# Allegro board arena_12-12_v1.brd
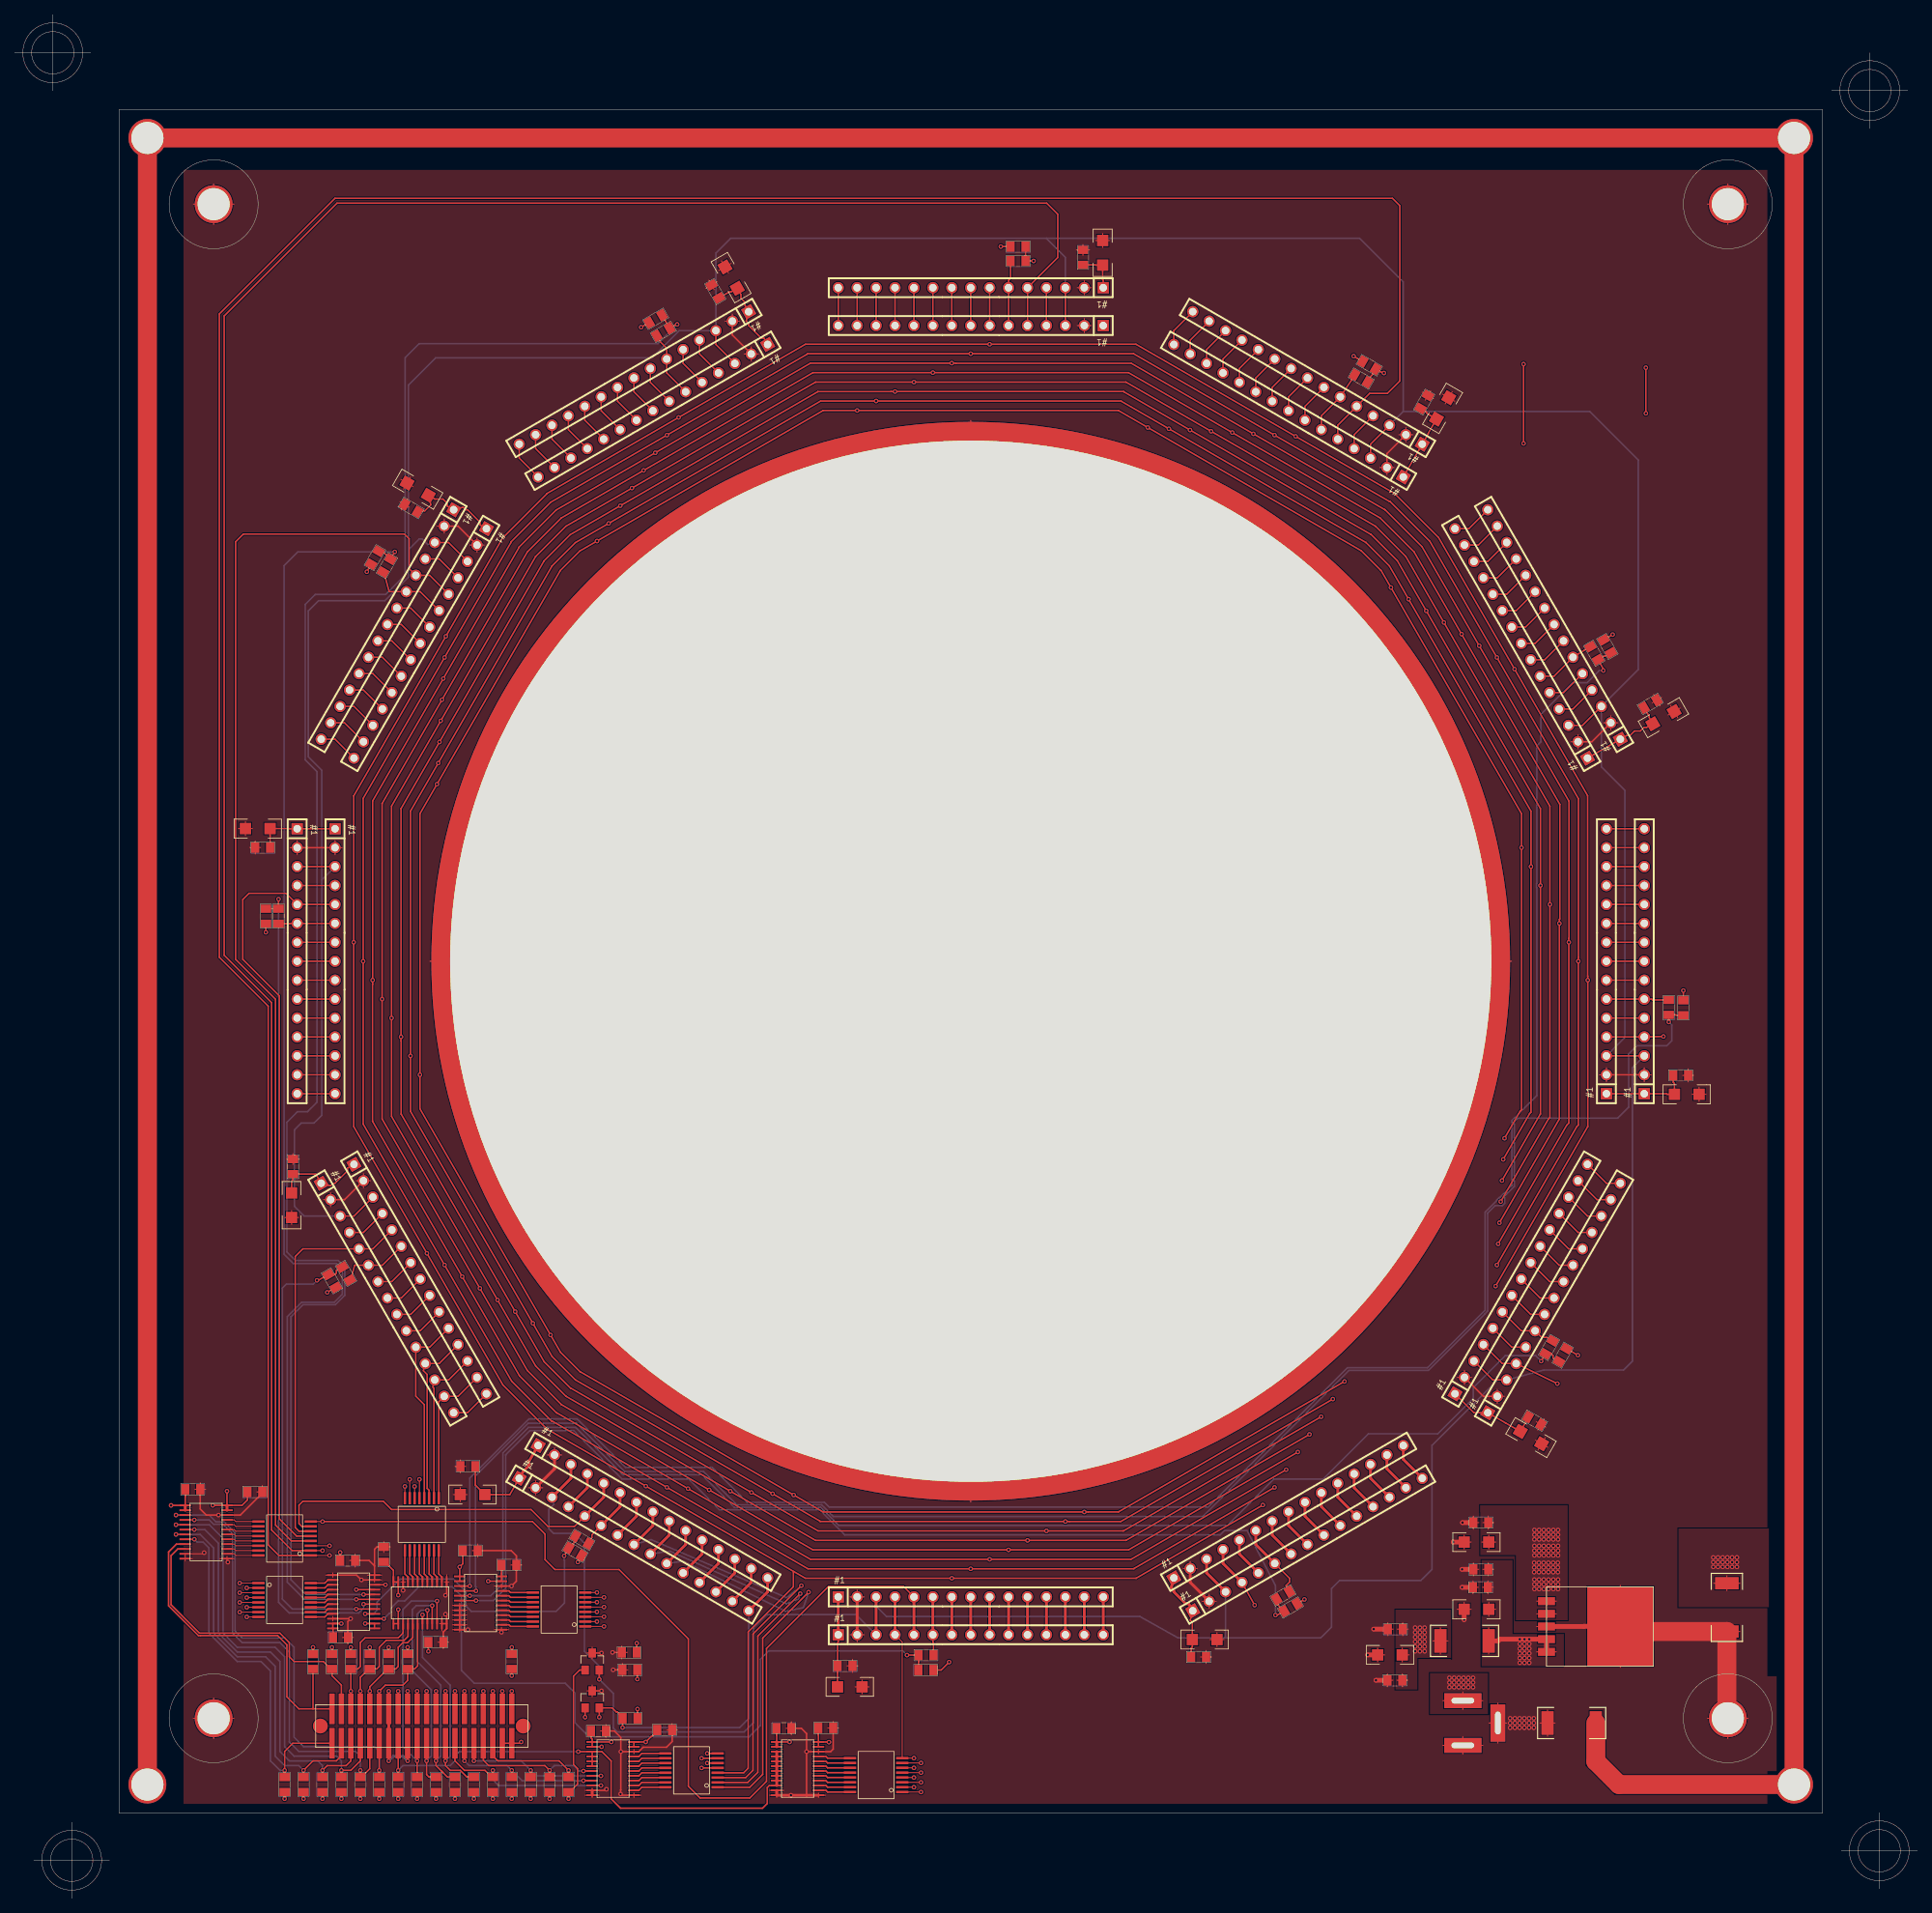
[diagram p0: board, top side]
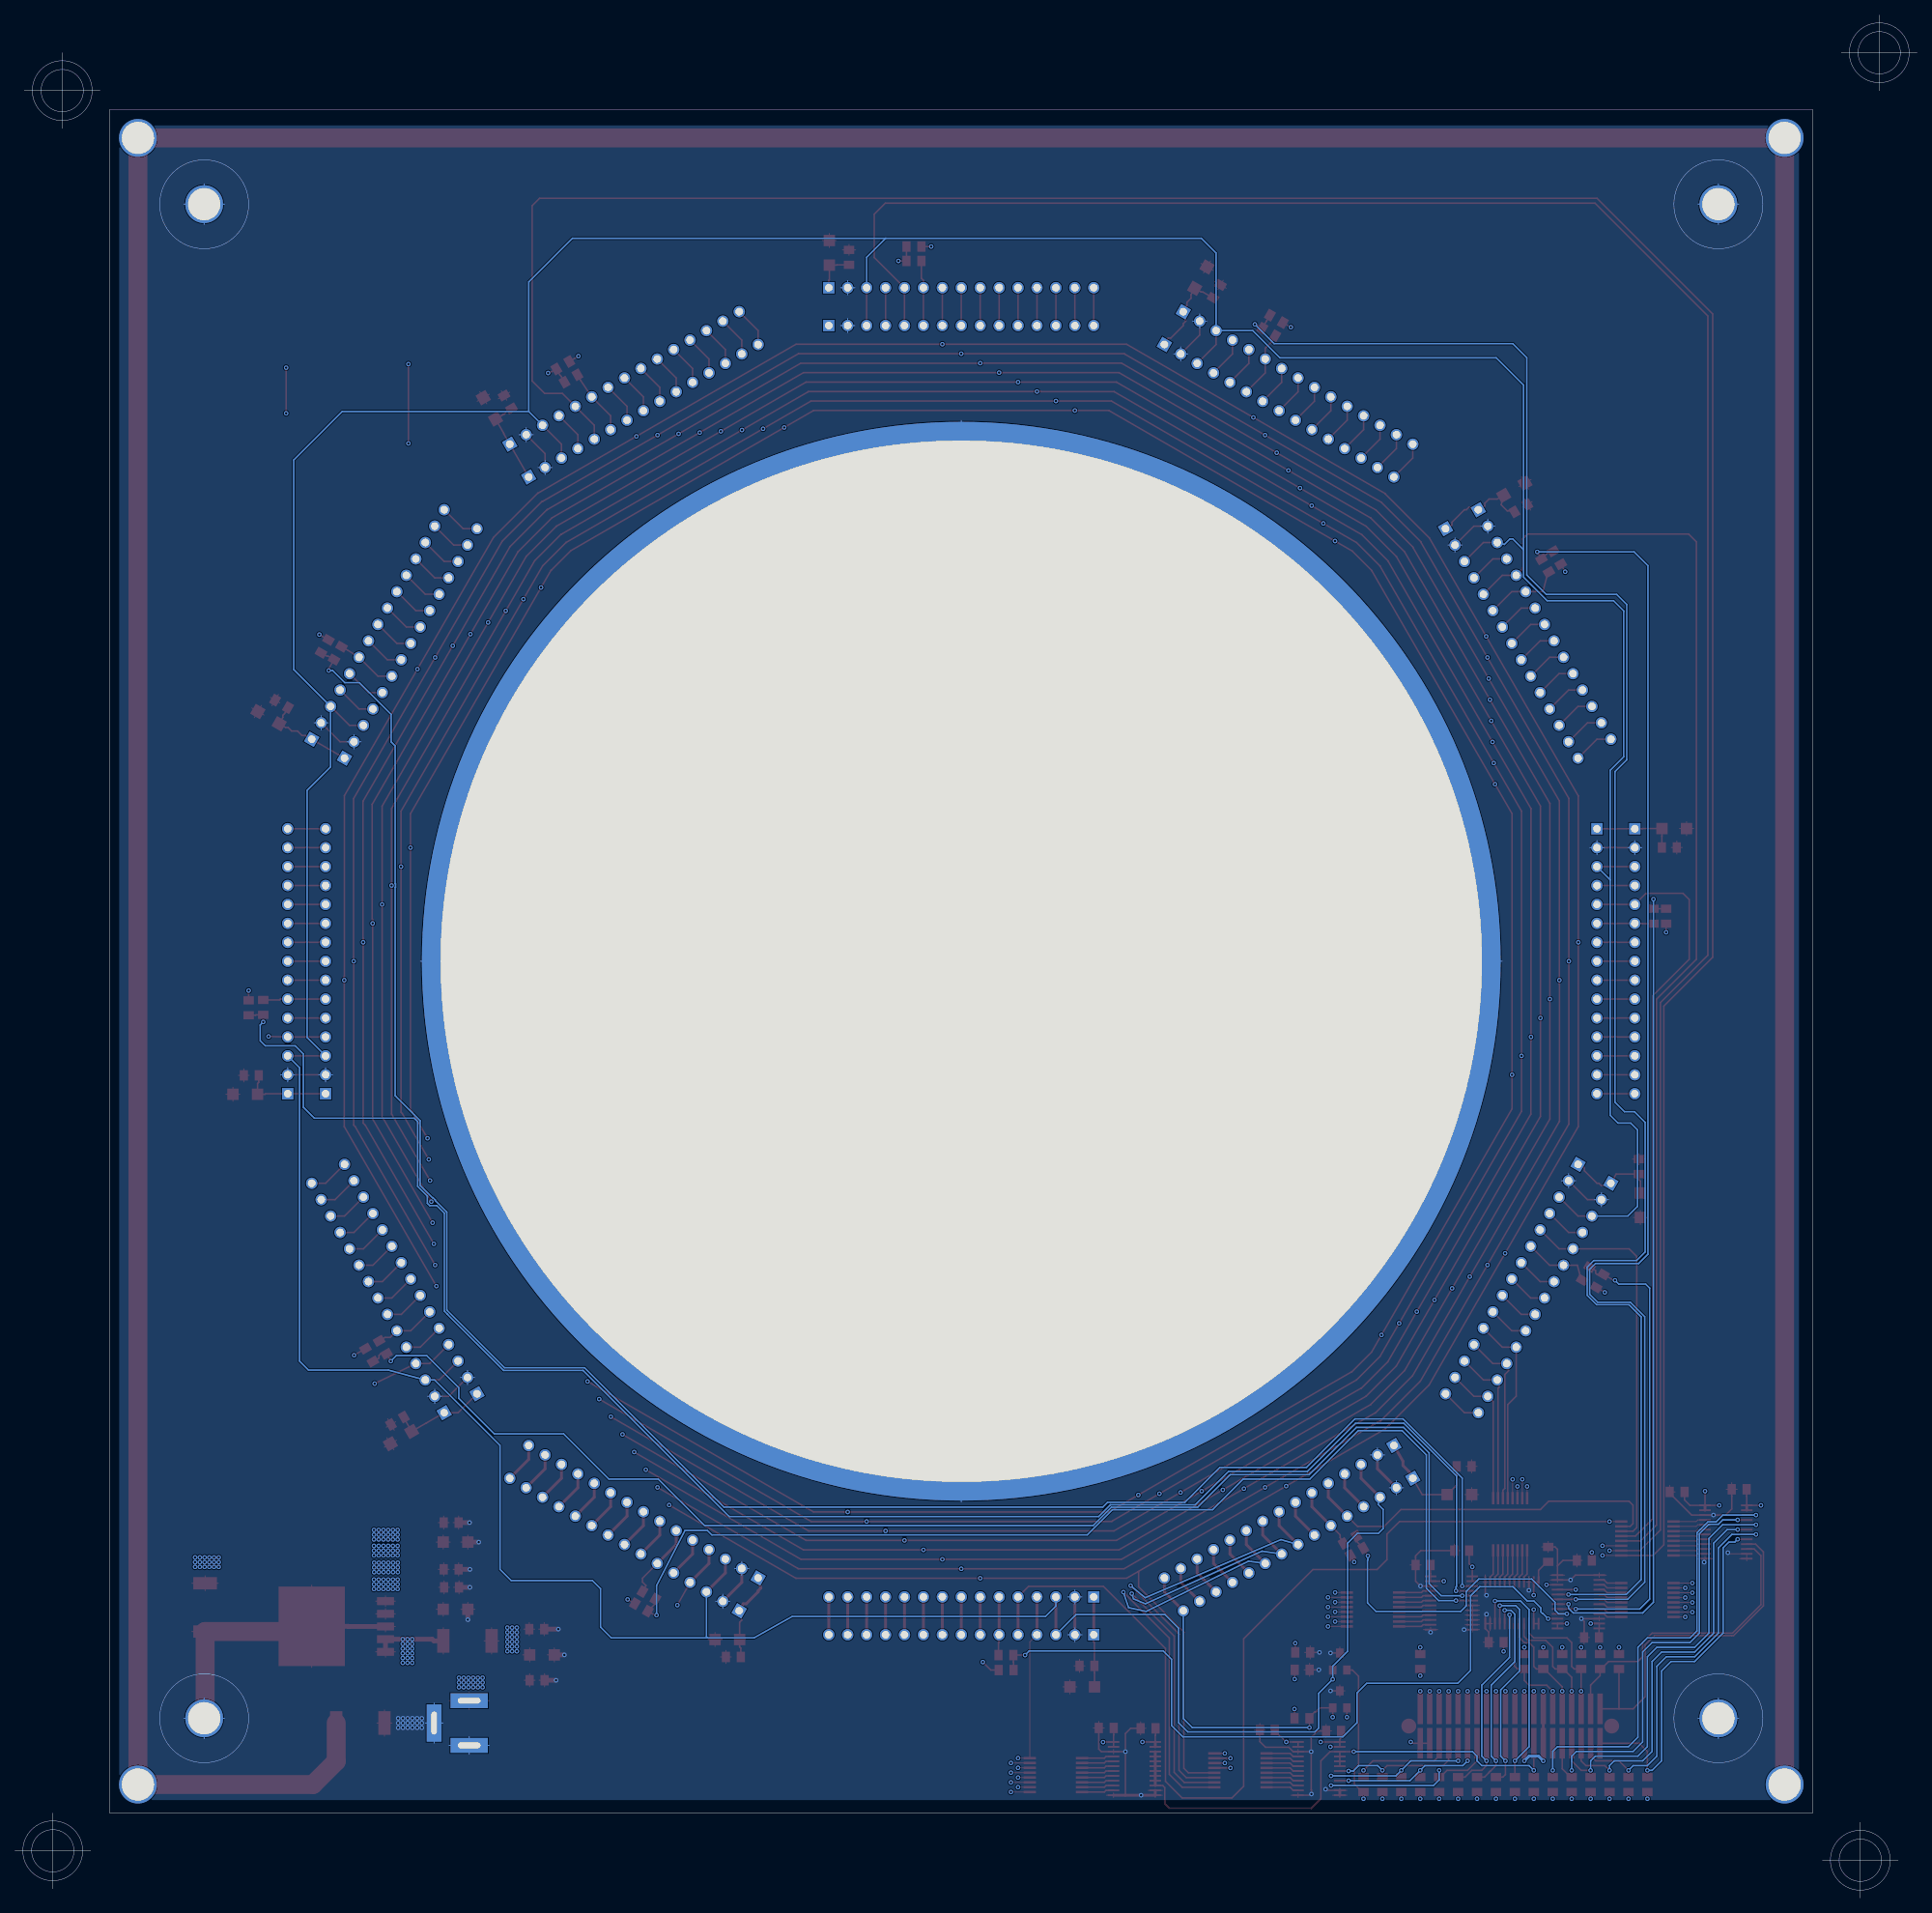
[diagram p1: board, bottom side, seen from below]

Outline 255.27 x 252.73 mm; copper layers: TOP, PWR, LAYER 1, GND2, LAYER 2, BOTTOM. Coordinates in mm from the lower left corner of the outline.
Outline path: circle c5.08,247.65 r2.84 ; circle c5.08,247.65 r4.02 ; circle c7.62,5.08 r2.84 ; circle c7.62,5.08 r4.02 ; circle c26.67,227.31 r5.97 ; circle c26.67,24.13 r5.97 ; circle c128.27,125.73 r69.85 ; circle c229.87,227.31 r5.97 ; circle c229.87,24.13 r5.97 ; circle c248.92,242.57 r2.84 ; circle c248.92,242.57 r4.02 ; circle c250.19,6.35 r2.84 ; circle c250.19,6.35 r4.02 ; 0,247.65 10.16,247.65 ; 2.54,5.08 12.7,5.08 ; 5.08,252.73 5.08,242.57 ; 7.62,10.16 7.62,0 ; 125.98,125.73 130.56,125.73 ; 128.27,123.44 128.27,128.02 ; 243.84,242.57 254,242.57 ; 245.11,6.35 255.27,6.35 ; 248.92,247.65 248.92,237.49 ; 250.19,11.43 250.19,1.27 ; 13.97,240.03 13.97,11.43 242.57,11.43 242.57,240.03 13.97,240.03

## Placement (name value [footprint] x y rotation side)
C1  10uF  [1206]  96.11 217.47 120 top
C2  10uF  [1206]  145.97 220.8 90 top
C3  0.1uF  [EIA0805]  189.13 200.79 60 top
C4  10uF  [1206]  191.59 199.92 60 top
C5  0.1uF  [EIA0805]  143.33 220.19 90 top
C6  0.1uF  [EIA0805]  93.98 215.62 120 top
C7  0.1uF  [0805]  53.16 186.54 150 top
C8  10uF  [1206]  54.05 189.08 150 top
C9  10uF  [1206]  224.36 107.87 0 top
C10  0.1uF  [EIA0805]  223.55 110.41 0 top
C11  10uF  [1206]  32.59 143.54 180 top
C12  0.1uF  [EIA0805]  33.25 141 180 top
C13  10uF  [1206]  203.45 61.8 330 top
C14  0.1uF  [EIA0805]  203.94 64.06 330 top
C15  10uF  [1206]  61.42 54.15 180 top
C16  0.1uF  [EIA0805]  60.78 57.94 180 top
C17  10uF  [1206]  159.66 34.7 0 top
C18  0.1uF  [EIA0805]  158.85 32.36 0 top
C19  0.1uF  [EIA0805]  111.4 31.17 0 top
C20  10uF  [1206]  112.04 28.35 0 top
C21  10uF  [1206]  37.13 92.99 270 top
C22  0.1uF  [EIA0805]  37.31 98.17 90 top
C23  10uF  [1206]  221.23 158.42 30 top
C24  0.1uF  [EIA0805]  219.48 160.27 30 top
C25  0.1uF  [EIA0805]  78.31 22.43 0 top
C26  0.1uF  [EIA0805]  87.2 22.56 0 top
C27  0.1uF  [EIA0805]  43.69 34.98 0 top
C28  0.1uF  [EIA0805]  49.5 46.13 90 top
C29  0.1uF  [EIA0805]  103.2 22.78 0 top
C30  0.1uF  [EIA0805]  108.81 22.83 0 top
C31  0.1uF  [EIA0805]  56.49 34.34 0 top
C32  0.1uF  [EIA0805]  44.65 45.31 0 top
C33  0.1uF  [EIA0805]  23.88 54.86 0 top
C34  0.1uF  [EIA0805]  32.21 54.51 0 top
C35  0.1uF  [EIA0805]  66.29 44.7 0 top
C36  0.1uF  [EIA0805]  61.11 46.63 0 top
C37  0.1uF  [EIA0805]  196.72 50.39 180 top
C38  10uF  [1206]  196.14 47.78 180 top
C39  10uF/6.3/Elec  [1206]  196.14 38.76 180 top
C40  0.001uF/X5R  [EIA0805]  196.67 41.71 180 top
C41  0.1uF/X5R  [EIA0805]  196.72 44.12 180 top
C42  2.2uF/60/Elec  [1206]  184.53 32.64 180 top
C43  0.01uF/X5R  [EIA0805]  185.19 29.24 180 top
C44  0.1uF/X5R  [EIA0805]  185.24 36.09 180 top
J1  CONN15  [HDR-1X15]  70.22 60.74 330 top
J2  CONN15  [HDR-1X15]  193.26 67.68 60 top
J3  CONN15  [HDR-1X15]  211.04 152.99 120 top
J4  CONN15  [HDR-1X15]  110.49 40.42 0 top
J5  CONN15  [HDR-1X15]  42.96 143.51 270 top
J6  CONN15  [HDR-1X15]  101.01 208.5 210 top
J7  CONN15  [HDR-1X15]  186.32 190.72 150 top
J8  CONN15  [HDR-1X15]  155.53 42.96 30 top
J9  CONN15  [HDR-1X15]  213.58 107.95 90 top
J10  CONN15  [HDR-1X15]  45.5 98.47 300 top
J11  CONN15  [HDR-1X15]  146.05 216.12 180 top
J12  CONN15  [HDR-1X15]  58.88 186.32 240 top
J13  CONN15  [HDR-1X15]  110.49 35.34 0 top
J14  CONN15  [HDR-1X15]  67.68 56.34 330 top
J15  CONN15  [HDR-1X15]  41.1 95.93 300 top
J16  CONN15  [HDR-1X15]  37.88 143.51 270 top
J17  CONN15  [HDR-1X15]  63.28 183.78 240 top
J18  CONN15  [HDR-1X15]  98.47 212.9 210 top
J19  CONN15  [HDR-1X15]  146.05 211.04 180 top
J20  CONN15  [HDR-1X15]  188.86 195.12 150 top
J21  CONN15  [HDR-1X15]  215.44 155.53 120 top
J22  CONN15  [HDR-1X15]  218.66 107.95 90 top
J23  CONN15  [HDR-1X15]  197.66 65.14 60 top
J24  CONN15  [HDR-1X15]  158.07 38.56 30 top
J25  A35051-ND (68pin, 1.27mm pitch, Through hold, A113405-ND)  [SMV_2X20]  66.68 25.4 270 top
J26  CP-102A-ND  [PJ102A]  194.31 23.5 180 top
L1  Ferrite Bead/5-15Ohm  [EIA2512]  208.92 23.5 0 top
L2  Ferrite Bead/5-15Ohm  [EIA2512]  229.74 39.01 270 top
L3  Ferrite Bead/5-15Ohm  [EIA2512]  194.54 34.52 180 top
M1  TEST POINT  [8-32]  238.76 15.24 0 top
M2  TEST POINT  [8-32]  17.78 15.24 0 top
M3  TEST POINT  [8-32]  229.87 24.13 0 top
M4  TEST POINT  [8-32]  26.67 24.13 0 top
M5  TEST POINT  [8-32]  229.87 227.33 0 top
M6  TEST POINT  [8-32]  26.67 227.33 0 top
M7  TEST POINT  [8-32]  17.78 236.22 0 top
M8  TEST POINT  [8-32]  238.76 236.22 0 top
M9  TEST POINT  [1-32]  128.27 125.73 0 top
NOREF  -  []  242.57 11.43 90 top
NOREF#2  -  []  13.97 240.03 0 top
NOREF#3  -  []  149.56 192.26 0 top
Q1  MTD4P06  [SOT-23]  77.47 31.75 0 top
Q3  MTD4P06  [SOT-23]  77.47 26.67 0 top
R1  27  [EIA0805]  122.28 32.61 0 top
R2  27  [EIA0805]  76.1 48.08 330 top
R3  27  [EIA0805]  44.45 83.82 300 top
R4  27  [EIA0805]  35.38 131.78 270 top
R5  27  [EIA0805]  49.91 178.82 240 top
R6  27  [EIA0805]  87 210.19 210 top
R7  27  [EIA0805]  134.62 219.71 180 top
R8  27  [EIA0805]  180.64 203.94 150 top
R9  27  [EIA0805]  211.94 167.08 120 top
R10  27  [EIA0805]  221.95 119.53 90 top
R11  27  [EIA0805]  205.89 73.91 60 top
R12  27  [EIA0805]  170.18 40.64 30 top
R13  200  [EIA0805]  74.3 15.24 270 top
R14  20K  [EIA0805]  82.52 30.63 0 top
R17  200  [EIA0805]  66.68 31.75 90 top
R18  20K  [EIA0805]  82.45 32.97 0 top
R19  4.7K  [EIA0805]  51.44 15.24 270 top
R20  4.7K  [EIA0805]  82.55 24.13 180 top
R21  4.7K  [EIA0805]  42.55 31.75 90 top
R22  4.7K  [EIA0805]  40.01 31.75 90 top
R23  4.7K  [EIA0805]  36.2 15.24 270 top
R24  4.7K  [EIA0805]  38.74 15.24 270 top
R25  4.7K  [EIA0805]  41.28 15.24 270 top
R26  4.7K  [EIA0805]  43.82 15.24 270 top
R27  4.7K  [EIA0805]  46.36 15.24 270 top
R28  4.7K  [EIA0805]  48.9 15.24 270 top
R29  4.7K  [EIA0805]  53.98 15.24 270 top
R30  4.7K  [EIA0805]  56.52 15.24 270 top
R31  4.7K  [EIA0805]  59.06 15.24 270 top
R32  4.7K  [EIA0805]  61.6 15.24 270 top
R33  4.7K  [EIA0805]  52.71 31.75 90 top
R34  4.7K  [EIA0805]  50.17 31.75 90 top
R35  4.7K  [EIA0805]  47.63 31.75 90 top
R36  4.7K  [EIA0805]  45.09 31.75 90 top
R37  4.7K  [EIA0805]  181.74 205.71 150 top
R38  4.7K  [EIA0805]  134.62 221.64 180 top
R39  4.7K  [EIA0805]  85.98 211.94 210 top
R40  4.7K  [EIA0805]  48.31 179.88 240 top
R41  4.7K  [EIA0805]  33.68 131.78 270 top
R42  4.7K  [EIA0805]  42.57 82.83 300 top
R43  4.7K  [EIA0805]  75.18 46.48 330 top
R44  4.7K  [EIA0805]  122.25 30.61 0 top
R49  4.7K  [EIA0805]  171.2 39.01 30 top
R50  4.7K  [EIA0805]  207.72 72.87 60 top
R51  4.7K  [EIA0805]  223.9 119.48 90 top
R52  4.7K  [EIA0805]  213.69 168 120 top
R57  4.7K  [EIA0805]  64.14 15.24 270 top
R58  4.7K  [EIA0805]  66.68 15.24 270 top
R59  4.7K  [EIA0805]  69.22 15.24 270 top
R60  4.7K  [EIA0805]  71.76 15.24 270 top
RN1  20  [SSOP16]  36.2 48.26 180 top
RN2  20  [SSOP16]  115.57 16.51 180 top
RN3  20  [SSOP16]  36.2 40.01 0 top
RN4  20  [SSOP16]  54.61 50.17 270 top
RN5  20  [SSOP16]  90.81 17.15 180 top
RN6  20  [SSOP16]  73.03 38.73 180 top
U1  SN74LVC8T245  [TSSOP24]  22.86 52.7 0 top
U2  SN74LVC8T245  [TSSOP24]  48.26 36.2 180 top
U3  SN74LVC8T245  [TSSOP24]  102.24 20.95 0 top
U4  SN74LVC8T245  [TSSOP24]  50.8 36.83 90 top
U5  SN74LVC8T245  [TSSOP24]  77.47 20.95 0 top
U6  SN74LVC8T245  [TSSOP24]  59.69 43.18 0 top
U7  LT1764  [DD5]  205.54 39.85 0 top

## Library data of the parts
C1 C2 C4 C8 C9 C11 C13 C15 C17 C20 C21 C23 C38 = CAPACITOR POL
C3 C5-C7 C10 C12 C14 C16 C18 C19 C22 C24-C37 = CAPACITOR NON-POL
C39 C42 = CAPACITOR
C40 C41 C43 C44 = CAP NP
J1-J24 = CONN RECT 15_7
J25 = HEADER 34x2_1
J26 = HEADER 3
L1-L3 = BEADARR_4
M1-M9 = TEST POINT
Q1 Q3 = MTD4P06
R1-R14 R17-R44 R49-R52 R57-R60 = RESISTOR
RN1-RN6 = RESNW_IS_8
U1-U6 = SN7474LVC8T245
U7 = LT1764

## Footprints (pads in the part's own frame, mm; a bottom-side part is the same pattern mirrored in y, then rotated)
1-32
  round 144.78 hole 139.7 unplated: (0,0)
8-32
  round 5.08 hole 4.305: 1(0,0)
0805
  rect 1.1x1.4 smd: 1(-1.001,0) 2(1.001,0)
1206
  rect 1.524x1.524 smd: 1(-1.651,0) 2(1.651,0)
DD5
  rect 2.286x1.067 smd: 1(0,0) 2(0,-1.702) 3(0,-3.404) 4(0,-5.105) 5(0,-6.807)
  rect 8.89x10.668 smd: 6(9.906,-3.378)
EIA0805
  rect 1.1x1.4 smd: 1(-1.001,0) 2(1.001,0)
EIA2512
  rect 1.651x3.175 smd: 1(-3.239,0) 2(3.239,0)
HDR-1X15
  rect 1.524x1.524 hole 1.016: 1(0,0)
  round 1.524 hole 1.016: 2(2.54,0) 3(5.08,0) 4(7.62,0) 5(10.16,0) 6(12.7,0) 7(15.24,0) 8(17.78,0) 9(20.32,0) 10(22.86,0) 11(25.4,0) 12(27.94,0) 13(30.48,0) 14(33.02,0) 15(35.56,0)
PJ102A
  rect 5.001x1.999 hole 3.051x0.759: 1(0,-3) 2(0,3)
  rect 1.999x5.001 hole 0.759x3.051: 3(-4.699,0)
SMV_2X20
  round 1.999 smd: (2.309,1.539) (2.309,-25.69)
  rect 4.11x0.729 smd: 1(0,0) 2(0,-1.27) 3(0,-2.54) 4(0,-3.81) 5(0,-5.08) 6(0,-6.35) 7(0,-7.62) 8(0,-8.89) 9(0,-10.16) 10(0,-11.43) 11(0,-12.7) 12(0,-13.97) 13(0,-15.24) 14(0,-16.51) 15(0,-17.78) 16(0,-19.05) 17(0,-20.32) 18(0,-21.59) 19(0,-22.86) 20(0,-24.13) 21(4.62,-24.13) 22(4.62,-22.86) 23(4.62,-21.59) 24(4.62,-20.32) 25(4.62,-19.05) 26(4.62,-17.78) 27(4.62,-16.51) 28(4.62,-15.24) 29(4.62,-13.97) 30(4.62,-12.7) 31(4.62,-11.43) 32(4.62,-10.16) 33(4.62,-8.89) 34(4.62,-7.62) 35(4.62,-6.35) 36(4.62,-5.08) 37(4.62,-3.81) 38(4.62,-2.54) 39(4.62,-1.27) 40(4.62,0)
SOT-23
  rect 1.016x1.219 smd: 1(-0.953,-1.143) 2(0.953,-1.143) 3(0,1.143)
SSOP16
  rect 1.651x0.33 smd: 1(-3.505,2.276) 2(-3.505,1.626) 3(-3.505,0.975) 4(-3.505,0.325) 5(-3.505,-0.325) 6(-3.505,-0.975) 7(-3.505,-1.626) 8(-3.505,-2.276) 9(3.505,-2.276) 10(3.505,-1.626) 11(3.505,-0.975) 12(3.505,-0.325) 13(3.505,0.325) 14(3.505,0.975) 15(3.505,1.626) 16(3.505,2.276)
TSSOP24
  rect 1.549x0.249 smd: 1(0,0) 2(0,-0.65) 3(0,-1.3) 4(0,-1.951) 5(0,-2.601) 6(0,-3.251) 7(0,-3.899) 8(0,-4.549) 9(0,-5.199) 10(0,-5.85) 11(0,-6.5) 12(0,-7.15) 13(5.601,-7.15) 14(5.601,-6.5) 15(5.601,-5.85) 16(5.601,-5.199) 17(5.601,-4.549) 18(5.601,-3.899) 19(5.601,-3.251) 20(5.601,-2.601) 21(5.601,-1.951) 22(5.601,-1.3) 23(5.601,-0.65) 24(5.601,0)

## Nets
3.3VDC: C25.1 C27.1 C29.1 C31.1 C33.1 C35.1 C42.1 C43.1 C44.1 L3.2 R19.2 R21.2 R22.2 R23.2 R24.2 R25.2 R26.2 R27.2 R28.2 R29.2 R30.2 R31.2 R32.2 R33.2 R34.2 R35.2 R36.2 R57.2 R58.2 R59.2 R60.2 U1.1(VCCA) U1.2(DIR) U2.23(VCCB2) U2.24(VCCB1) U3.1(VCCA) U3.2(DIR) U4.1(VCCA) U4.2(DIR) U5.1(VCCA) U5.2(DIR) U6.23(VCCB2) U6.24(VCCB1)
5VDC: C1.1 C2.1 C3.1 C4.1 C5.1 C6.1 C7.1 C8.1 C9.1 C10.1 C11.1 C12.1 C13.1 C14.1 C15.1 C16.1 C17.1 C18.1 C19.1 C20.1 C21.1 C22.1 C23.1 C24.1 C26.1 C28.1 C30.1 C32.1 C34.1 C36.1 C37.1 C38.1 J1.1 J2.1 J3.1 J4.1 J5.1 J6.1 J7.1 J8.1 J9.1 J10.1 J11.1 J12.1 J13.1 J14.1 J15.1 J16.1 J17.1 J18.1 J19.1 J20.1 J21.1 J22.1 J23.1 J24.1 J26.1 R20.1 R37.2 R38.2 R39.2 R40.2 R41.2 R42.2 R43.2 R44.2 R49.2 R50.2 R51.2 R52.2 U1.23(VCCB2) U1.24(VCCB1) U2.1(VCCA) U2.2(DIR) U3.23(VCCB2) U3.24(VCCB1) U4.23(VCCB2) U4.24(VCCB1) U5.23(VCCB2) U5.24(VCCB1) U6.1(VCCA) U6.2(DIR) U7.1(IN) U7.2(EN)
GND: C1.2 C2.2 C3.2 C4.2 C5.2 C6.2 C7.2 C8.2 C9.2 C10.2 C11.2 C12.2 C13.2 C14.2 C15.2 C16.2 C17.2 C18.2 C19.2 C20.2 C21.2 C22.2 C23.2 C24.2 C25.2 C26.2 C27.2 C28.2 C29.2 C30.2 C31.2 C32.2 C33.2 C34.2 C35.2 C36.2 C37.2 C38.2 C39.2 C40.2 C41.2 C42.2 C43.2 C44.2 J1.2 J2.2 J3.2 J4.2 J5.2 J6.2 J7.2 J8.2 J9.2 J10.2 J11.2 J12.2 J13.2 J14.2 J15.2 J16.2 J17.2 J18.2 J19.2 J20.2 J21.2 J22.2 J23.2 J24.2 J26.2 J26.3 L1.1 L2.2 M3.1 M4.1 M5.1 M6.1 Q1.3(S) Q3.3(S) R14.1 R18.1 U1.11(GND1) U1.12(GND2) U1.13(GND3) U1.22(\\O\E\) U2.11(GND1) U2.12(GND2) U2.13(GND3) U2.22(\\O\E\) U3.11(GND1) U3.12(GND2) U3.13(GND3) U3.22(\\O\E\) U4.11(GND1) U4.12(GND2) U4.13(GND3) U4.22(\\O\E\) U5.11(GND1) U5.12(GND2) U5.13(GND3) U5.22(\\O\E\) U6.7(A5) U6.8(A6) U6.9(A7) U6.10(A8) U6.11(GND1) U6.12(GND2) U6.13(GND3) U6.22(\\O\E\) U7.3(GND) U7.6(PAD)
GND_SIGNAL: J25.14 J25.27 J25.29 J25.39 J25.40 L2.1
CS0: J1.7 J2.7 J3.7 J4.7 J5.7 J6.7 J7.7 J8.7 J9.7 J10.7 J11.7 J12.7 J13.7 J14.7 J15.7 J16.7 J17.7 J18.7 J19.7 J20.7 J21.7 J22.7 J23.7 J24.7 RN5.4
CS1: J1.8 J2.8 J3.8 J4.8 J5.8 J6.8 J7.8 J8.8 J9.8 J10.8 J11.8 J12.8 J13.8 J14.8 J15.8 J16.8 J17.8 J18.8 J19.8 J20.8 J21.8 J22.8 J23.8 J24.8 RN5.3
CS2: J1.9 J2.9 J3.9 J4.9 J5.9 J6.9 J7.9 J8.9 J9.9 J10.9 J11.9 J12.9 J13.9 J14.9 J15.9 J16.9 J17.9 J18.9 J19.9 J20.9 J21.9 J22.9 J23.9 J24.9 RN5.2
CS3: J1.10 J2.10 J3.10 J4.10 J5.10 J6.10 J7.10 J8.10 J9.10 J10.10 J11.10 J12.10 J13.10 J14.10 J15.10 J16.10 J17.10 J18.10 J19.10 J20.10 J21.10 J22.10 J23.10 J24.10 RN5.1
CS4: J1.11 J2.11 J3.11 J4.11 J5.11 J6.11 J7.11 J8.11 J9.11 J10.11 J11.11 J12.11 J13.11 J14.11 J15.11 J16.11 J17.11 J18.11 J19.11 J20.11 J21.11 J22.11 J23.11 J24.11 RN4.4
CS5: J1.12 J2.12 J3.12 J4.12 J5.12 J6.12 J7.12 J8.12 J9.12 J10.12 J11.12 J12.12 J13.12 J14.12 J15.12 J16.12 J17.12 J18.12 J19.12 J20.12 J21.12 J22.12 J23.12 J24.12 RN4.3
CS6: J1.13 J2.13 J3.13 J4.13 J5.13 J6.13 J7.13 J8.13 J9.13 J10.13 J11.13 J12.13 J13.13 J14.13 J15.13 J16.13 J17.13 J18.13 J19.13 J20.13 J21.13 J22.13 J23.13 J24.13 RN4.2
CS7: J1.14 J2.14 J3.14 J4.14 J5.14 J6.14 J7.14 J8.14 J9.14 J10.14 J11.14 J12.14 J13.14 J14.14 J15.14 J16.14 J17.14 J18.14 J19.14 J20.14 J21.14 J22.14 J23.14 J24.14 RN4.1
CS_IN_0: J25.37 R60.1 U5.7(A5)
CS_IN_1: J25.36 R59.1 U5.8(A6)
CS_IN_2: J25.35 R58.1 U5.9(A7)
CS_IN_3: J25.34 R57.1 U5.10(A8)
CS_IN_4: J25.33 R32.1 U4.7(A5)
CS_IN_5: J25.32 R31.1 U4.8(A6)
CS_IN_6: J25.31 R30.1 U4.9(A7)
CS_IN_7: J25.30 R29.1 U4.10(A8)
EXT_INT: J1.15 J2.15 J3.15 J4.15 J5.15 J6.15 J7.15 J8.15 J9.15 J10.15 J11.15 J12.15 J13.15 J14.15 J15.15 J16.15 J17.15 J18.15 J19.15 J20.15 J21.15 J22.15 J23.15 J24.15 Q3.2(D) R20.2
EXT_INT_IN: J25.1 R17.1
MISO_0: R1.1 R44.1 U2.3(A1)
MISO_1: R2.1 R43.1 U2.4(A2)
MISO_2: R3.1 R42.1 U2.5(A3)
MISO_3: R4.1 R41.1 U2.6(A4)
MISO_4: R5.1 R40.1 U2.7(A5)
MISO_5: R6.1 R39.1 U2.8(A6)
MISO_6: R7.1 R38.1 U2.9(A7)
MISO_7: R8.1 R37.1 U2.10(A8)
MISO_8: R9.1 R52.1 U6.3(A1)
MISO_9: R10.1 R51.1 U6.4(A2)
MISO_10: R11.1 R50.1 U6.5(A3)
MISO_11: R12.1 R49.1 U6.6(A4)
MISO_OUT_0: J25.13 RN3.8
MISO_OUT_1: J25.12 RN3.7
MISO_OUT_2: J25.11 RN3.6
MISO_OUT_3: J25.10 RN3.5
MISO_OUT_4: J25.9 RN3.4
MISO_OUT_5: J25.8 RN3.3
MISO_OUT_6: J25.7 RN3.2
MISO_OUT_7: J25.6 RN3.1
MISO_OUT_8: J25.5 RN6.8
MISO_OUT_9: J25.4 RN6.7
MISO_OUT_10: J25.3 RN6.6
MISO_OUT_11: J25.2 RN6.5
MOSI_0: J4.5 J13.5 RN1.8
MOSI_1: J1.5 J14.5 RN1.7
MOSI_2: J10.5 J15.5 RN1.6
MOSI_3: J5.5 J16.5 RN1.5
MOSI_4: J12.5 J17.5 RN1.4
MOSI_5: J6.5 J18.5 RN1.3
MOSI_6: J11.5 J19.5 RN1.2
MOSI_7: J7.5 J20.5 RN1.1
MOSI_8: J3.5 J21.5 RN4.8
MOSI_9: J9.5 J22.5 RN4.7
MOSI_10: J2.5 J23.5 RN4.6
MOSI_11: J8.5 J24.5 RN4.5
MOSI_IN_0: J25.26 R28.1 U1.3(A1)
MOSI_IN_1: J25.25 R27.1 U1.4(A2)
MOSI_IN_2: J25.24 R26.1 U1.5(A3)
MOSI_IN_3: J25.23 R25.1 U1.6(A4)
MOSI_IN_4: J25.22 R24.1 U1.7(A5)
MOSI_IN_5: J25.21 R23.1 U1.8(A6)
MOSI_IN_6: J25.20 R22.1 U1.9(A7)
MOSI_IN_7: J25.19 R21.1 U1.10(A8)
MOSI_IN_8: J25.18 R36.1 U4.3(A1)
MOSI_IN_9: J25.17 R35.1 U4.4(A2)
MOSI_IN_10: J25.16 R34.1 U4.5(A3)
MOSI_IN_11: J25.15 R33.1 U4.6(A4)
RESET: J1.3 J2.3 J3.3 J4.3 J5.3 J6.3 J7.3 J8.3 J9.3 J10.3 J11.3 J12.3 J13.3 J14.3 J15.3 J16.3 J17.3 J18.3 J19.3 J20.3 J21.3 J22.3 J23.3 J24.3 Q1.2(D)
RESET_IN: J25.38 R13.1
SCK_0: J4.4 J13.4 RN2.8
SCK_1: J1.4 J14.4 RN2.7
SCK_2: J10.4 J15.4 RN2.6
SCK_3: J5.4 J16.4 RN2.5
SCK_4: J12.4 J17.4 RN2.4
SCK_5: J6.4 J18.4 RN2.3
SCK_6: J11.4 J19.4 RN2.2
SCK_7: J7.4 J20.4 RN2.1
SCK_8: J3.4 J21.4 RN5.8
SCK_9: J9.4 J22.4 RN5.7
SCK_10: J2.4 J23.4 RN5.6
SCK_11: J8.4 J24.4 RN5.5
SCK_IN_0: J25.28 R19.1 U3.3(A1) U3.4(A2) U3.5(A3) U3.6(A4) U3.7(A5) U3.8(A6) U3.9(A7) U3.10(A8) U5.3(A1) U5.4(A2) U5.5(A3) U5.6(A4)
N00182: J4.6 J13.6 R1.2
N04213: J1.6 J14.6 R2.2
N04860: J10.6 J15.6 R3.2
N05048: J5.6 J16.6 R4.2
N06135: J12.6 J17.6 R5.2
N06323: J6.6 J18.6 R6.2
N06511: J11.6 J19.6 R7.2
N06699: J7.6 J20.6 R8.2
N07866: J3.6 J21.6 R9.2
N08054: J9.6 J22.6 R10.2
N08430: J8.6 J24.6 R12.2
N65117: J2.6 J23.6 R11.2
N65750: Q1.1(G) R13.2 R14.2
N124786: C39.1 C40.1 C41.1 L3.1 U7.4(OUT) U7.5(SENSE)
N207682: Q3.1(G) R17.2 R18.2
N248336: L1.2 M1.1 M2.1 M7.1 M8.1
N926808: RN3.9 U2.21(B1)
N926809: RN3.10 U2.20(B2)
N935118: RN2.9 U3.21(B1)
N935119: RN2.10 U3.20(B2)
N953908: RN1.9 U1.21(B1)
N953909: RN1.10 U1.20(B2)
N9268010: RN3.11 U2.19(B3)
N9268011: RN3.12 U2.18(B4)
N9268012: RN3.13 U2.17(B5)
N9268013: RN3.14 U2.16(B6)
N9268014: RN3.15 U2.15(B7)
N9268015: RN3.16 U2.14(B8)
N9351110: RN2.11 U3.19(B3)
N9351111: RN2.12 U3.18(B4)
N9351112: RN2.13 U3.17(B5)
N9351113: RN2.14 U3.16(B6)
N9351114: RN2.15 U3.15(B7)
N9351115: RN2.16 U3.14(B8)
N9539010: RN1.11 U1.19(B3)
N9539011: RN1.12 U1.18(B4)
N9539012: RN1.13 U1.17(B5)
N9539013: RN1.14 U1.16(B6)
N9539014: RN1.15 U1.15(B7)
N9539015: RN1.16 U1.14(B8)
N10228215: RN4.9 U4.21(B1)
N10228216: RN4.10 U4.20(B2)
N10228217: RN4.11 U4.19(B3)
N10228218: RN4.12 U4.18(B4)
N10228219: RN4.13 U4.17(B5)
N10228220: RN4.14 U4.16(B6)
N10228221: RN4.15 U4.15(B7)
N10228222: RN4.16 U4.14(B8)
N10904015: RN5.9 U5.21(B1)
N10904016: RN5.10 U5.20(B2)
N10904017: RN5.11 U5.19(B3)
N10904018: RN5.12 U5.18(B4)
N10904019: RN5.13 U5.17(B5)
N10904020: RN5.14 U5.16(B6)
N10904021: RN5.15 U5.15(B7)
N10904022: RN5.16 U5.14(B8)
N11250315: RN6.9 U6.21(B1)
N11250316: RN6.10 U6.20(B2)
N11250317: RN6.11 U6.19(B3)
N11250318: RN6.12 U6.18(B4)
N11250319: RN6.13 U6.17(B5)
N11250320: RN6.14 U6.16(B6)
N11250321: RN6.15 U6.15(B7)
N11250322: RN6.16 U6.14(B8)

Pads without a net: RN6 1 2 3 4

## Via types
v1: diameter 0.61, hole 0.33, TOP to BOTTOM, 469 vias

## Routing (per net, layer and track width the routed paths; a pad name or vN(x,y) marks a point on that pad's centre or on a via; arc(x,y) is an arc through that point)
3.3VDC: length 59.5
  TOP w0.127: L3.2 191.3,36.29 ; L3.2 192.31,34.52 ; L3.2 190.29,34.52 ; L3.2 191.3,32.75 ; C43.1 186.92,29.24 ; C43.1 186.19,30.12 ; C43.1 186.19,28.35 ; C43.1 185.46,29.24 ; C42.1 186.18,33.58 ; C42.1 187.12,32.64 ; C42.1 186.18,31.7 ; 186.24,35.21 C44.1 ; C44.1 185.51,36.09 ; C44.1 186.24,36.97 ; C44.1 186.97,36.09
  TOP w0.203: R32.2 v1(61.6,13.34) ; U5.1 U5.2 v1(78.72,20.3) ; U5.1 v1(80.04,20.95) ; U5.1 77.47,21.34 77.31,21.5 C25.1 ; R60.2 v1(71.76,13.34) ; R31.2 v1(59.06,13.34) ; R27.2 v1(46.36,13.34) ; C29.1 102.2,21.85 102.24,21.82 U3.1 v1(103.96,20.95) ; R29.2 v1(53.98,13.34) ; R26.2 v1(43.82,13.34) ; R19.2 v1(51.44,13.34) ; C27.1 42.69,36.17 U2.24 U2.23 v1(43.8,36.85) ; R57.2 v1(64.14,13.34) ; R22.2 v1(40.01,33.66) ; v1(51.45,38.72) U4.2 U4.1 ; R34.2 v1(50.17,33.66) ; R30.2 v1(56.52,13.34) ; R36.2 v1(45.09,33.66) ; C33.1 22.88,53.93 22.86,53.92 U1.1 v1(20.96,52.7) ; R59.2 v1(69.22,13.34) ; R21.2 v1(42.55,33.66) ; C31.1 v1(55.49,33.11) ; C35.1 65.29,43.54 65.29,43.53 U6.24 U6.23 v1(63.52,42.53) ; R28.2 v1(48.9,13.34) ; R58.2 v1(66.68,13.34) ; R33.2 v1(52.71,33.66) ; R35.2 v1(47.63,33.66) ; R23.2 v1(36.2,13.34) ; R25.2 v1(41.28,13.34) ; R24.2 v1(38.74,13.34)
  TOP w0.381: U1.2 U1.1 ; U3.2 U3.1
  vias: v1(187.91,36.3) v1(187.91,35.66) v1(187.91,35.03) v1(187.91,34.39) v1(187.91,33.76) v1(187.91,33.12) v1(188.54,36.3) v1(188.54,35.66) v1(188.54,35.03) v1(188.54,34.39) v1(188.54,33.76) v1(188.54,33.12) v1(189.18,36.3) v1(189.18,35.66) v1(189.18,35.03) v1(189.18,34.39) v1(189.18,33.76) v1(189.18,33.12)
5VDC: length 313.4
  TOP w0.127: 205.54,39.14 U7.1 ; U7.1 206.86,39.85 ; U7.1 205.54,40.57 ; U7.1 204.21,39.85 ; 204.21,38.15 U7.2 ; U7.2 205.54,38.86 ; U7.2 205.54,37.44 ; U7.2 206.86,38.15 ; 191.63,26.49 J26.1 ; J26.1 194.31,27.68 ; J26.1 194.31,25.31 ; J26.1 196.99,26.49 ; 197.79,46.84 C38.1 ; C38.1 196.85,47.78 ; C38.1 197.79,48.72 ; C38.1 198.73,47.78 ; 196.99,50.39 C37.1 ; C37.1 197.72,49.51 ; C37.1 197.72,51.27 ; C37.1 198.46,50.39 ; C32.1 v1(43.65,46.4)
  TOP w0.203: U3.24 U3.23 ; U3.24 108.84,20.95 v1(109.25,20.93) ; U3.24 107.84,21.88 107.81,21.9 C30.1 ; U2.1 U2.2 v1(47.01,36.85) ; 218.62,159.77 219.08,158.97 219.31,158.74 219.31,158.45 C23.1 218.95,157.1 218.6,157.1 218.13,156.62 217.34,156.62 216.74,156.02 216.3,156.02 J21.1 214.58,155.03 211.9,153.48 J3.1 ; J14.1 66.42,54.15 C15.1 61.78,55.44 C16.1 ; R20.1 v1(83.55,25.37) ; R39.2 v1(84.04,210.82) ; J9.1 J22.1 221.64,107.95 221.72,107.87 C9.1 222.71,109.32 222.54,109.48 C10.1 ; J5.1 J16.1 36.89,143.51 36.87,143.54 C11.1 34.24,142.54 34.25,142.53 C12.1 ; R49.2 v1(173.05,40.08) ; C26.1 86.2,22.41 85.48,21.69 85.39,21.69 v1(84.66,20.95) U5.24 U5.23 ; J17.1 62.42,184.28 62.42,184.64 60.74,186.32 60.48,186.32 60.14,186.66 J12.1 58.02,186.82 58.02,187.18 57.44,187.76 56.34,187.76 C8.1 55.82,186.99 55,186.17 54.1,186.17 C7.1 ; J24.1 157.73,37.3 158.01,37.01 C17.1 158.01,33.71 157.85,33.54 C18.1 ; C5.1 144.94,219.19 144.98,219.15 C2.1 145.97,217.19 146.05,217.11 J11.1 ; R40.2 v1(47.23,178) ; C34.1 31.22,54.5 31.22,53.44 30.48,52.7 U1.24 ; 43.07,81.96 v1(41.91,81.29) ; U1.24 v1(26.56,52.7) ; U1.24 v1(28.46,54.61) ; 208.22,73.74 v1(209.75,72.85) ; v1(51.45,40.66) U4.23 U4.24 50.8,43.98 49.65,45.13 C28.1 ; R52.2 v1(214.42,169.57) ; J6.1 100.52,209.36 100.15,209.36 98.47,211.04 98.47,211.3 98.14,211.64 J18.1 97.98,213.76 97.98,214.16 97.43,214.7 97.43,215.19 C1.1 96.08,215.55 95.86,215.55 C6.1 ; J10.1 44.64,97.98 44.64,97.61 42.96,95.93 42.7,95.93 42.36,95.6 J15.1 40.39,97.17 C22.1 37.31,96.39 37.13,96.21 C21.1 ; C20.1 110.39,30.22 110.4,30.24 C19.1 110.4,34.26 110.49,34.35 J13.1 ; R44.2 124.31,30.61 v1(125.37,31.67) ; C36.1 60.11,44.87 v1(59.69,44.45) U6.1 U6.2 ; R38.2 v1(132.31,221.64) ; v1(179.65,206.93) 180.2,206.6 R37.2 ; R51.2 v1(223.9,121.79) ; R43.2 v1(75.54,45.1) ; R41.2 v1(33.68,129.62) ; J7.1 186.82,191.58 188.37,194.26 J20.1 189.67,196.51 189.67,196.59 C4.1 189.91,198.99 189.76,199.14 189.62,199.14 189.43,199.32 189.43,199.46 C3.1 ; C14.1 203.07,64.44 C13.1 200.04,63.77 200.04,63.77 J23.1 195.8,65.14 J2.1
  TOP w0.381: J4.1 J13.1 ; J24.1 157.53,39.5 157.13,39.5 155.53,41.1 155.53,41.24 155.16,41.61 J8.1 ; J1.1 69,58.63 69,58.05 68.22,57.28 J14.1 ; U1.23 U1.24
  PWR w0.127: 57.94,186.32 J12.1 ; J12.1 58.88,185.38 ; J12.1 59.82,186.32 ; J12.1 58.88,187.26 ; J21.1 215.44,156.47 ; J21.1 216.38,155.53 ; J21.1 214.5,155.53 ; J21.1 215.44,154.58 ; J4.1 110.49,41.36 ; J4.1 109.55,40.42 ; J4.1 110.49,39.48 ; J4.1 111.43,40.42 ; J11.1 146.99,216.12 ; J11.1 145.11,216.12 ; J11.1 146.05,217.06 ; J11.1 146.05,215.18 ; J7.1 186.32,191.66 ; J7.1 187.26,190.72 ; J7.1 186.32,189.78 ; J7.1 185.38,190.72 ; 154.58,42.96 J8.1 ; J8.1 155.53,43.9 ; J8.1 156.47,42.96 ; J8.1 155.53,42.02 ; 217.72,107.95 J22.1 ; J22.1 218.66,107.01 ; J22.1 218.66,108.89 ; J22.1 219.6,107.95 ; J13.1 110.49,36.28 ; J13.1 109.55,35.34 ; J13.1 111.43,35.34 ; J13.1 110.49,34.4 ; 213.58,107.01 J9.1 ; J9.1 214.52,107.95 ; J9.1 213.58,108.89 ; J9.1 212.64,107.95 ; 191.63,26.49 J26.1 ; J26.1 196.99,26.49 ; J26.1 194.31,25.31 ; J26.1 194.31,27.68 ; 157.12,38.56 J24.1 ; J24.1 158.07,39.5 ; J24.1 158.07,37.62 ; J24.1 159.01,38.56 ; 45.5,97.53 J10.1 ; J10.1 46.44,98.47 ; J10.1 45.5,99.42 ; J10.1 44.56,98.47 ; J5.1 42.96,144.45 ; J5.1 42.96,142.57 ; J5.1 43.9,143.51 ; J5.1 42.02,143.51 ; 69.28,60.74 J1.1 ; J1.1 71.16,60.74 ; J1.1 70.22,59.8 ; J1.1 70.22,61.68 ; 210.1,152.99 J3.1 ; J3.1 211.04,152.04 ; J3.1 211.04,153.93 ; J3.1 211.98,152.99 ; 66.74,56.34 J14.1 ; J14.1 67.68,55.4 ; J14.1 68.62,56.34 ; J14.1 67.68,57.28 ; J20.1 188.86,196.06 ; J20.1 187.92,195.12 ; J20.1 189.8,195.12 ; J20.1 188.86,194.18 ; 62.34,183.78 J17.1 ; J17.1 63.28,184.72 ; J17.1 63.28,182.84 ; J17.1 64.22,183.78 ; 40.16,95.93 J15.1 ; J15.1 41.1,96.88 ; J15.1 42.04,95.93 ; J15.1 41.1,94.99 ; J16.1 38.82,143.51 ; J16.1 37.88,144.45 ; J16.1 37.88,142.57 ; J16.1 36.94,143.51 ; J23.1 197.66,66.08 ; J23.1 197.66,64.2 ; J23.1 198.6,65.14 ; J23.1 196.72,65.14 ; J6.1 101.01,209.44 ; J6.1 101.96,208.5 ; J6.1 101.01,207.56 ; J6.1 100.07,208.5 ; J19.1 146.99,211.04 ; J19.1 146.05,211.98 ; J19.1 146.05,210.1 ; J19.1 145.11,211.04 ; 193.26,66.74 J2.1 ; J2.1 193.26,68.62 ; J2.1 192.32,67.68 ; J2.1 194.2,67.68 ; J18.1 99.42,212.9 ; J18.1 97.53,212.9 ; J18.1 98.47,211.96 ; J18.1 98.47,213.84
  vias: v1(192.51,29.57) v1(192.51,28.93) v1(192.51,28.3) v1(193.14,29.57) v1(193.14,28.93) v1(193.14,28.3) v1(193.78,29.57) v1(193.78,28.93) v1(193.78,28.3) v1(194.41,29.57) v1(194.41,28.93) v1(194.41,28.3) v1(195.05,29.57) v1(195.05,28.93) v1(195.05,28.3) v1(195.68,29.57) v1(195.68,28.93) v1(195.68,28.3) v1(203.91,49.4) v1(203.91,48.77) v1(203.91,48.13) v1(203.91,47.27) v1(203.91,46.63) v1(203.91,46) v1(203.89,45.01) v1(203.89,44.37) v1(203.89,43.74) v1(203.91,42.75) v1(203.91,42.11) v1(203.91,41.48) v1(204.55,49.4) v1(204.55,48.77) v1(204.55,48.13) v1(204.55,47.27) v1(204.55,46.63) v1(204.55,46) v1(204.52,45.01) v1(204.52,44.37) v1(204.52,43.74) v1(204.55,42.75) v1(204.55,42.11) v1(204.55,41.48) v1(205.18,49.4) v1(205.18,48.77) v1(205.18,48.13) v1(205.18,47.27) v1(205.18,46.63) v1(205.18,46) v1(205.16,45.01) v1(205.16,44.37) v1(205.16,43.74) v1(205.18,42.75) v1(205.18,42.11) v1(205.18,41.48) v1(205.82,49.4) v1(205.82,48.77) v1(205.82,48.13) v1(205.82,47.27) v1(205.82,46.63) v1(205.82,46) v1(205.79,45.01) v1(205.79,44.37) v1(205.79,43.74) v1(205.82,42.75) v1(205.82,42.11) v1(205.82,41.48) v1(206.45,49.4) v1(206.45,48.77) v1(206.45,48.13) v1(206.45,47.27) v1(206.45,46.63) v1(206.45,46) v1(206.43,45.01) v1(206.43,44.37) v1(206.43,43.74) v1(206.45,42.75) v1(206.45,42.11) v1(206.45,41.48) v1(207.09,49.4) v1(207.09,48.77) v1(207.09,48.13) v1(207.09,47.27) v1(207.09,46.63) v1(207.09,46) v1(207.06,45.01) v1(207.06,44.37) v1(207.06,43.74) v1(207.09,42.75) v1(207.09,42.11) v1(207.09,41.48)
GND: length 2599.1
  TOP w0.127: R14.1 82.26,30.63 ; R14.1 81.52,31.51 ; R14.1 81.52,29.75 ; C22.2 37.31,99.9 ; C22.2 37.31,98.44 ; C22.2 36.43,99.17 ; C22.2 38.19,99.17 ; 194.49,46.84 C38.2 ; C38.2 194.49,48.72 ; C38.2 195.43,47.78 ; C41.2 195.72,45 ; C41.2 196.45,44.12 ; C41.2 195.72,43.24 ; 64.34,36.03 U6.13 ; U6.13 66.25,36.03 ; U6.13 65.29,36.33 ; 27.51,45.55 U1.13 ; U1.13 28.46,45.86 ; U1.13 29.42,45.55 ; U1.13 28.46,45.2 v1(28.58,45.09) ; 161.32,33.75 C17.2 ; C17.2 160.37,34.7 ; C17.2 162.26,34.7 ; C17.2 161.32,35.64 ; 184.24,35.21 C44.2 ; C44.2 184.24,36.97 ; C44.2 184.97,36.09 ; 56.76,34.34 C31.2 ; C31.2 58.22,34.34 ; C31.2 57.49,33.46 ; 62.01,180.64 J17.2 ; J17.2 62.01,182.52 ; J17.2 62.95,181.58 ; J17.2 61.07,181.58 ; 33.21,55.39 C34.2 32.48,54.51 ; C9.2 226.95,107.87 ; C9.2 226.01,108.82 ; C9.2 226.01,106.93 ; C9.2 225.07,107.87 ; J16.2 37.88,141.91 ; J16.2 37.88,140.03 ; J16.2 36.94,140.97 ; v1(25.4,46.36) 25.25,46.21 U1.11 U1.12 ; 52.15,189.09 C8.2 ; C8.2 53.09,190.72 ; C8.2 53.44,189.43 ; C8.2 51.81,190.38 ; 57.3,35.87 U4.11 ; U4.11 57.3,37.79 ; U4.11 57,36.83 ; 204.07,61.45 C13.2 ; C13.2 205.36,61.79 ; C13.2 204.41,60.16 ; C13.2 205.7,60.5 ; 205.54,35.74 U7.3 204.21,36.45 ; J22.2 218.66,111.43 ; J22.2 219.6,110.49 ; J22.2 218.66,109.55 ; 58.73,37.33 U6.10 60.65,37.33 ; J1.2 73.36,59.47 ; J1.2 72.42,60.41 ; J1.2 71.48,59.47 ; C42.2 182.88,33.58 ; C42.2 182.88,31.7 ; C42.2 183.82,32.64 ; 60.65,38.63 U6.8 58.73,38.63 ; 51.66,187.4 C7.2 ; C7.2 52.74,187.8 ; C7.2 52.93,186.67 ; C7.2 51.85,186.27 ; J24.2 161.21,39.83 ; J24.2 159.32,39.83 ; J24.2 160.27,38.89 ; J24.2 160.27,40.77 ; 60.65,37.98 U6.9 58.73,37.98 ; U1.12 23.82,45.55 ; U1.12 22.86,45.25 ; 101.28,13.8 U3.12 102.24,13.5 ; 23.95,227.33 M6.1 ; M6.1 26.67,230.05 ; M6.1 29.39,227.33 ; M6.1 26.67,224.61 ; 48.26,42.39 U2.11 49.22,42.69 ; J10.2 46.77,97.22 ; J10.2 45.83,96.27 ; J10.2 47.71,96.27 ; J10.2 46.77,95.33 ; J20.2 186.66,197.33 ; J20.2 187.6,196.39 ; J20.2 186.66,195.45 ; J20.2 185.72,196.39 ; 223.81,110.41 C10.2 ; C10.2 225.28,110.41 ; C10.2 224.55,111.3 ; C10.2 224.55,109.53 ; 81.45,32.09 R18.1 ; R18.1 82.18,32.97 ; R18.1 81.45,33.85 ; J11.2 143.51,217.06 ; J11.2 144.45,216.12 ; J11.2 143.51,215.18 ; J11.2 142.57,216.12 ; 113.03,34.4 J13.2 ; J13.2 112.09,35.34 ; J13.2 113.97,35.34 ; 195.72,49.51 C37.2 ; C37.2 195.72,51.27 ; C37.2 196.45,50.39 ; 215.44,30.96 U7.6 ; U7.6 215.44,41.99 ; U7.6 220.07,36.47 ; 31.52,141 C12.2 ; C12.2 32.25,141.88 ; C12.2 32.25,140.11 ; C12.2 32.98,141 ; L1.1 206.68,23.5 ; L1.1 204.67,23.5 ; L1.1 205.68,25.26 ; L1.1 205.68,21.73 ; J7.2 185.06,191.99 ; J7.2 183.18,191.99 ; J7.2 184.12,191.05 ; 93.48,216.49 94.24,216.93 ; 93.48,216.49 93.85,215.85 ; 93.48,216.49 93.11,217.12 ; 93.48,216.49 92.72,216.05 ; C5.2 144.21,221.19 ; C5.2 143.33,221.92 ; C5.2 142.45,221.19 ; C5.2 143.33,220.46 ; J8.2 157.73,45.17 ; J8.2 158.67,44.23 ; J8.2 156.78,44.23 ; 42.66,37.8 U2.22 42.66,37.19 ; U6.22 65.29,42.18 ; U6.22 64.34,41.88 ; U6.22 65.29,41.57 ; J4.2 113.03,41.36 ; J4.2 112.09,40.42 ; J4.2 113.97,40.42 ; J5.2 42.96,141.91 ; J5.2 42.96,140.03 ; J5.2 43.9,140.97 ; 145.97,221.51 C2.2 ; C2.2 145.97,223.4 ; C2.2 146.92,222.45 ; C2.2 145.03,222.45 ; 23.95,24.13 M4.1 ; M4.1 26.67,21.41 ; M4.1 29.39,24.13 ; M4.1 26.67,26.85 ; J14.2 69.88,56.01 ; J14.2 70.82,55.07 ; J14.2 69.88,54.13 ; J14.2 68.94,55.07 ; 214.17,156.78 J21.2 ; J21.2 214.17,158.67 ; J21.2 215.11,157.73 ; J21.2 213.23,157.73 ; 59.78,57.06 C16.2 ; C16.2 59.78,58.82 ; C16.2 59.05,57.94 ; C16.2 60.51,57.94 ; U5.12 78.43,13.8 ; U5.12 77.47,13.5 ; U5.12 76.51,13.8 ; 222.19,160.06 C23.2 ; C23.2 221.85,158.78 ; C23.2 223.13,158.43 ; C23.2 223.48,159.72 ; 24.15,54.86 C33.2 ; C33.2 25.61,54.86 ; C33.2 24.88,55.75 ; J3.2 209.77,156.13 ; J3.2 208.83,155.19 ; J3.2 209.77,154.24 ; C43.2 184.92,29.24 ; C43.2 184.19,28.35 ; C43.2 184.19,30.12 ; C18.2 159.85,33.24 ; C18.2 159.85,31.48 ; C18.2 159.12,32.36 ; C18.2 160.58,32.36 ; 193.55,38.76 C39.2 ; C39.2 195.43,38.76 ; C39.2 194.49,39.7 ; 104.2,21.9 C29.2 ; C29.2 103.47,22.78 ; C29.2 104.2,23.67 ; C27.2 45.42,34.98 ; C27.2 43.96,34.98 ; C27.2 44.69,35.86 ; C27.2 44.69,34.09 ; 194.53,68.94 J2.2 ; J2.2 193.59,69.88 ; J2.2 194.53,70.82 ; J2.2 195.47,69.88 ; 68.03,44.7 C35.2 66.56,44.7 ; U5.13 83.07,14.11 ; U5.13 83.07,13.5 ; U5.13 84.03,13.8 ; J23.2 199.87,67.34 ; J23.2 198.93,66.4 ; J23.2 198.93,68.28 ; 204.8,63.56 205.24,64.32 ; 204.8,63.56 204.17,63.92 ; 204.8,63.56 204.36,62.79 ; 204.8,63.56 205.44,63.19 ; 37.13,90.4 C21.2 ; C21.2 36.19,91.34 ; C21.2 38.08,91.34 ; C21.2 37.13,92.28 ; 55.7,125.73 128.27,125.73 ; 128.27,125.73 128.27,53.16 ; 128.27,125.73 200.84,125.73 ; 128.27,125.73 128.27,198.3 ; C15.2 60.71,54.15 ; C15.2 59.77,55.1 ; C15.2 58.82,54.15 ; C15.2 59.77,53.21 ; 189.26,201.02 C3.2 ; C3.2 189.99,202.29 ; C3.2 188.86,202.1 ; C3.2 190.39,201.21 ; 83.07,19.35 U5.22 83.07,19.96 ; 103.19,14.46 U3.11 101.28,14.46 ; C24.2 220.98,161.14 ; C24.2 220.79,160.01 ; C24.2 219.72,160.41 ; C24.2 219.91,161.54 ; 94.82,219.72 C1.2 ; C1.2 94.47,218.43 ; C1.2 96.1,219.37 ; C1.2 95.76,218.09 ; U1.22 v1(27.34,51.4) ; J9.2 213.58,111.43 ; J9.2 212.64,110.49 ; J9.2 213.58,109.55 ; 98.81,206.29 J6.2 ; J6.2 99.76,207.23 ; J6.2 97.87,207.23 ; J6.2 98.81,208.17 ; 112.75,28.35 C20.2 ; C20.2 113.69,29.29 ; C20.2 114.63,28.35 ; C20.2 113.69,27.4 ; J26.2 194.31,21.68 ; J26.2 194.31,19.31 ; J26.2 191.63,20.5 ; J26.2 196.99,20.5 ; 77.47,32.1 Q1.3 ; Q1.3 77.47,33.68 ; Q1.3 76.78,32.89 ; U2.13 42.66,43.65 ; U2.13 41.7,43.35 ; U2.13 42.66,43.04 ; C4.2 193.23,200.88 ; C4.2 191.95,200.54 ; C4.2 192.89,202.17 ; C4.2 191.6,201.83 ; 57.61,183.18 J12.2 ; J12.2 56.67,184.12 ; J12.2 57.61,185.06 ; C36.2 62.11,47.52 ; C36.2 61.38,46.63 ; C36.2 62.11,45.75 ; 227.15,227.33 M5.1 ; M5.1 229.87,224.61 ; M5.1 232.59,227.33 ; M5.1 229.87,230.05 ; J18.2 96.27,212.57 ; J18.2 95.33,211.63 ; J18.2 97.22,211.63 ; C40.2 196.4,41.71 ; C40.2 195.67,40.83 ; C40.2 195.67,42.59 ; 60.65,36.68 U6.11 58.73,36.68 ; C26.2 88.2,23.44 ; C26.2 88.93,22.56 ; C26.2 87.47,22.56 ; C11.2 30.94,144.48 ; C11.2 30.94,142.59 ; C11.2 31.88,143.54 ; C11.2 29.99,143.54 ; 76.78,27.81 Q3.3 ; Q3.3 77.47,27.02 ; Q3.3 77.47,28.6 ; 229.74,36.78 L2.2 231.51,35.78 ; 42.37,92.79 J15.2 ; J15.2 41.43,93.73 ; J15.2 42.37,94.68 ; 58.73,39.28 U6.7 ; U6.7 60.65,39.28 ; U6.7 59.69,39.59 ; C30.2 110.55,22.83 ; C30.2 109.81,23.72 ; C30.2 109.08,22.83 ; 107.84,13.5 U3.13 ; U3.13 108.79,13.8 ; U3.13 107.84,14.11 ; J19.2 144.45,211.04 ; J19.2 142.57,211.04 ; J19.2 143.51,210.1 ; J19.2 143.51,211.98 ; 57.65,42.43 U4.13 ; U4.13 57.95,43.39 ; U4.13 58.25,42.43 ; C28.2 49.5,47.86 ; C28.2 49.5,46.4 ; C28.2 50.39,47.13 ; 49.22,43.35 U2.12 47.3,43.35 ; C32.2 45.65,46.19 ; C32.2 44.92,45.31 ; C32.2 45.65,44.43 ; 227.15,24.13 M3.1 ; M3.1 232.59,24.13 ; M3.1 229.87,26.85 ; M3.1 229.87,21.41 ; J26.3 200.19,23.5 ; J26.3 197.83,23.5 ; J26.3 199.01,20.81 ; J26.3 199.01,26.18 ; 107.84,19.96 U3.22 107.84,19.35 ; 76.51,14.46 U5.11 77.47,14.76 ; C25.2 79.31,23.31 ; C25.2 79.31,21.55 ; C25.2 78.58,22.43 ; 59.69,35.73 U6.12 58.73,36.03 ; 52.41,42.43 U4.22 51.8,42.43 ; 112.41,30.28 C19.2 ; C19.2 113.14,31.17 ; C19.2 112.41,32.05 ; C19.2 111.67,31.17
  TOP w0.203: R18.1 v1(80.2,32.97) ; v1(57.79,40.64) 57.95,40.81 U4.13 ; v1(81.31,19.65) 81.31,21.56 80.44,22.43 C25.2 ; v1(81.31,19.65) U5.22 83.72,19.65 84.31,20.24 87.44,20.24 88.2,21.01 C26.2 ; v1(81.31,19.65) 81.31,14.53 81.28,14.5 v1(81.28,13.97) 81.45,13.8 U5.13 ; 48.26,44.58 U2.12 U2.11 v1(46.5,42.69) 45.85,43.35 U2.13 ; 48.26,44.58 48.26,46.81 48.57,47.13 C28.2 ; 48.26,44.58 47.52,45.31 C32.2 ; U6.13 v1(65.29,35.67) ; J15.2 44.23,93.73 J10.2 ; J17.2 59.47,184.12 J12.2 ; J9.2 J22.2 ; v1(106.24,19.65) 106.24,13.81 106.25,13.8 ; v1(106.24,19.65) U3.22 109.47,19.65 109.81,20 C30.2 ; v1(106.24,19.65) 106.24,22.08 105.54,22.78 C29.2 ; C31.2 57.49,35.72 57.95,36.18 U4.12 ; J7.2 184.12,193.85 J20.2 ; U6.7 U6.8 U6.9 U6.10 U6.11 U6.12 v1(60.79,36.03) ; Q3.3 v1(78.71,27.81) ; J2.2 197.07,67.34 J23.2 ; v1(201.3,23.5) v1(201.3,24.13) ; C33.2 24.88,53.93 24.87,53.92 24.87,52.22 25.68,51.4 v1(27.34,51.4) ; U2.22 v1(45.05,37.5) 44.68,37.12 44.68,34.99 C27.2 ; U6.22 v1(66.64,41.88) 67.29,42.53 C35.2 67.29,45.7 67.3,45.71 67.3,45.93 66.6,46.63 C36.2 ; C34.2 33.21,54.36 30.25,51.4 U1.22 ; Q1.3 v1(78.71,32.89) ; J16.2 J5.2 ; U4.12 57.95,37.93 v1(57.79,38.1) ; U4.12 U4.11 ; J21.2 211.63,155.19 J3.2 ; v1(79.38,14.61) 79.23,14.46 U5.11 ; U4.22 v1(52.1,41.31) ; R14.1 v1(80.28,30.63) ; J6.2 96.27,209.77 J18.2
  TOP w0.381: U5.12 U5.11 ; J8.2 157.73,42.37 J24.2 ; J4.2 J13.2 ; U3.13 v1(104.14,13.8) U3.12 U3.11 ; J1.2 72.42,57.61 J14.2
  TOP w0.635: C38.2 v1(193.02,47.78) ; U7.3 210.53,36.45 210.55,36.47 U7.6 ; C39.2 v1(194.49,37.36) ; C42.2 v1(181.53,32.64) ; C40.2 v1(194.21,41.71) ; C43.2 v1(182.65,29.24) ; C41.2 v1(194.21,44.12) ; C37.2 v1(194.26,50.39) ; C44.2 v1(182.35,36.09)
  TOP w2.54: U7.6 216.14,35.78 L2.2 229.74,24.26 M3.1
  LAYER 1 w0.127: J16.2 37.88,141.91 ; J16.2 38.82,140.97 ; J16.2 37.88,140.03 ; J16.2 36.94,140.97 ; J10.2 46.77,97.22 ; J10.2 45.83,96.27 ; J10.2 47.71,96.27 ; J10.2 46.77,95.33 ; J26.3 200.19,23.5 ; J26.3 199.01,26.18 ; J26.3 199.01,20.81 ; J26.3 197.83,23.5 ; 213.23,157.73 J21.2 ; J21.2 215.11,157.73 ; J21.2 214.17,158.67 ; J21.2 214.17,156.78 ; 128.27,125.73 128.27,198.3 ; 128.27,125.73 55.7,125.73 ; 128.27,125.73 128.27,53.16 ; 128.27,125.73 200.84,125.73 ; J9.2 213.58,111.43 ; J9.2 214.52,110.49 ; J9.2 212.64,110.49 ; J9.2 213.58,109.55 ; J3.2 209.77,156.13 ; J3.2 208.83,155.19 ; J3.2 210.71,155.19 ; J3.2 209.77,154.24 ; 157.73,43.29 J8.2 ; J8.2 156.78,44.23 ; J8.2 157.73,45.17 ; J8.2 158.67,44.23 ; J7.2 184.12,192.93 ; J7.2 183.18,191.99 ; J7.2 185.06,191.99 ; J7.2 184.12,191.05 ; 97.87,207.23 J6.2 ; J6.2 98.81,206.29 ; J6.2 99.76,207.23 ; J6.2 98.81,208.17 ; J20.2 187.6,196.39 ; J20.2 186.66,195.45 ; J20.2 186.66,197.33 ; J20.2 185.72,196.39 ; J17.2 62.95,181.58 ; J17.2 61.07,181.58 ; J17.2 62.01,182.52 ; J17.2 62.01,180.64 ; J15.2 43.31,93.73 ; J15.2 41.43,93.73 ; J15.2 42.37,94.68 ; J15.2 42.37,92.79 ; J14.2 70.82,55.07 ; J14.2 69.88,54.13 ; J14.2 68.94,55.07 ; J14.2 69.88,56.01 ; 95.33,211.63 J18.2 ; J18.2 97.22,211.63 ; J18.2 96.27,210.69 ; J18.2 96.27,212.57 ; 23.95,24.13 M4.1 ; M4.1 29.39,24.13 ; M4.1 26.67,21.41 ; M4.1 26.67,26.85 ; J11.2 144.45,216.12 ; J11.2 142.57,216.12 ; J11.2 143.51,215.18 ; J11.2 143.51,217.06 ; J5.2 42.96,141.91 ; J5.2 42.02,140.97 ; J5.2 42.96,140.03 ; J5.2 43.9,140.97 ; M6.1 26.67,230.05 ; M6.1 26.67,224.61 ; M6.1 29.39,227.33 ; M6.1 23.95,227.33 ; 194.53,68.94 J2.2 ; J2.2 193.59,69.88 ; J2.2 194.53,70.82 ; J2.2 195.47,69.88 ; 159.32,39.83 J24.2 ; J24.2 160.27,40.77 ; J24.2 160.27,38.89 ; J24.2 161.21,39.83 ; J26.2 194.31,21.68 ; J26.2 196.99,20.5 ; J26.2 191.63,20.5 ; J26.2 194.31,19.31 ; 71.48,59.47 J1.2 ; J1.2 72.42,60.41 ; J1.2 73.36,59.47 ; J1.2 72.42,58.53 ; J12.2 57.61,185.06 ; J12.2 57.61,183.18 ; J12.2 56.67,184.12 ; J12.2 58.55,184.12 ; J19.2 143.51,211.98 ; J19.2 143.51,210.1 ; J19.2 142.57,211.04 ; J19.2 144.45,211.04 ; 112.09,40.42 J4.2 ; J4.2 113.03,41.36 ; J4.2 113.97,40.42 ; J4.2 113.03,39.48 ; M5.1 229.87,230.05 ; M5.1 229.87,224.61 ; M5.1 227.15,227.33 ; M5.1 232.59,227.33 ; 112.09,35.34 J13.2 ; J13.2 113.03,36.28 ; J13.2 113.03,34.4 ; J13.2 113.97,35.34 ; 218.66,109.55 J22.2 ; J22.2 219.6,110.49 ; J22.2 218.66,111.43 ; J22.2 217.72,110.49 ; J23.2 198.93,68.28 ; J23.2 199.87,67.34 ; J23.2 198.93,66.4 ; J23.2 197.99,67.34 ; 227.15,24.13 M3.1 ; M3.1 229.87,26.85 ; M3.1 229.87,21.41 ; M3.1 232.59,24.13
  GND2 w0.127: M5.1 229.87,230.05 ; M5.1 232.59,227.33 ; M5.1 229.87,224.61 ; M5.1 227.15,227.33 ; J3.2 209.77,156.13 ; J3.2 208.83,155.19 ; J3.2 209.77,154.24 ; J3.2 210.71,155.19 ; J5.2 42.96,141.91 ; J5.2 42.96,140.03 ; J5.2 43.9,140.97 ; J5.2 42.02,140.97 ; 62.01,180.64 J17.2 ; J17.2 62.95,181.58 ; J17.2 62.01,182.52 ; J17.2 61.07,181.58 ; 229.87,21.41 M3.1 ; M3.1 232.59,24.13 ; M3.1 229.87,26.85 ; M3.1 227.15,24.13 ; J7.2 185.06,191.99 ; J7.2 184.12,192.93 ; J7.2 183.18,191.99 ; J7.2 184.12,191.05 ; 97.87,207.23 J6.2 ; J6.2 99.76,207.23 ; J6.2 98.81,206.29 ; J6.2 98.81,208.17 ; J16.2 38.82,140.97 ; J16.2 36.94,140.97 ; J16.2 37.88,141.91 ; J16.2 37.88,140.03 ; 71.48,59.47 J1.2 ; J1.2 73.36,59.47 ; J1.2 72.42,60.41 ; J1.2 72.42,58.53 ; J22.2 219.6,110.49 ; J22.2 218.66,109.55 ; J22.2 217.72,110.49 ; J22.2 218.66,111.43 ; J12.2 58.55,184.12 ; J12.2 57.61,183.18 ; J12.2 56.67,184.12 ; J12.2 57.61,185.06 ; J18.2 96.27,212.57 ; J18.2 95.33,211.63 ; J18.2 96.27,210.69 ; J18.2 97.22,211.63 ; J19.2 144.45,211.04 ; J19.2 143.51,211.98 ; J19.2 143.51,210.1 ; J19.2 142.57,211.04 ; 214.17,156.78 J21.2 ; J21.2 215.11,157.73 ; J21.2 213.23,157.73 ; J21.2 214.17,158.67 ; 213.58,109.55 J9.2 ; J9.2 214.52,110.49 ; J9.2 213.58,111.43 ; J9.2 212.64,110.49 ; 68.94,55.07 J14.2 ; J14.2 69.88,56.01 ; J14.2 69.88,54.13 ; J14.2 70.82,55.07 ; J26.3 199.01,26.18 ; 194.53,68.94 J2.2 ; J2.2 194.53,70.82 ; J2.2 193.59,69.88 ; J2.2 195.47,69.88 ; 26.67,21.41 M4.1 ; M4.1 29.39,24.13 ; M4.1 26.67,26.85 ; M4.1 23.95,24.13 ; J11.2 144.45,216.12 ; J11.2 143.51,217.06 ; J11.2 143.51,215.18 ; J11.2 142.57,216.12 ; 198.93,66.4 J23.2 ; J23.2 198.93,68.28 ; J23.2 197.99,67.34 ; J23.2 199.87,67.34 ; 55.7,125.73 128.27,125.73 ; 128.27,125.73 128.27,53.16 ; 128.27,125.73 200.84,125.73 ; 128.27,125.73 128.27,198.3 ; J8.2 158.67,44.23 ; J8.2 156.78,44.23 ; J8.2 157.73,43.29 ; J8.2 157.73,45.17 ; M6.1 26.67,230.05 ; M6.1 29.39,227.33 ; M6.1 26.67,224.61 ; M6.1 23.95,227.33 ; J10.2 47.71,96.27 ; J10.2 45.83,96.27 ; J10.2 46.77,95.33 ; J10.2 46.77,97.22 ; 113.03,34.4 J13.2 ; J13.2 113.97,35.34 ; J13.2 112.09,35.34 ; J13.2 113.03,36.28 ; J15.2 42.37,94.68 ; J15.2 43.31,93.73 ; J15.2 41.43,93.73 ; J15.2 42.37,92.79 ; 186.66,195.45 J20.2 ; J20.2 186.66,197.33 ; J20.2 185.72,196.39 ; J20.2 187.6,196.39 ; 160.27,38.89 J24.2 ; J24.2 159.32,39.83 ; J24.2 161.21,39.83 ; J24.2 160.27,40.77 ; 112.09,40.42 J4.2 ; J4.2 113.03,41.36 ; J4.2 113.97,40.42 ; J4.2 113.03,39.48
  LAYER 2 w0.127: 229.87,21.41 M3.1 ; M3.1 232.59,24.13 ; M3.1 229.87,26.85 ; M3.1 227.15,24.13 ; J10.2 46.77,97.22 ; J10.2 45.83,96.27 ; J10.2 46.77,95.33 ; J10.2 47.71,96.27 ; 68.94,55.07 J14.2 ; J14.2 69.88,54.13 ; J14.2 70.82,55.07 ; J14.2 69.88,56.01 ; 36.94,140.97 J16.2 ; J16.2 38.82,140.97 ; J16.2 37.88,140.03 ; J16.2 37.88,141.91 ; 97.87,207.23 J6.2 ; J6.2 98.81,208.17 ; J6.2 99.76,207.23 ; J6.2 98.81,206.29 ; 214.17,156.78 J21.2 ; J21.2 213.23,157.73 ; J21.2 215.11,157.73 ; J21.2 214.17,158.67 ; J12.2 58.55,184.12 ; J12.2 57.61,183.18 ; J12.2 57.61,185.06 ; J12.2 56.67,184.12 ; J26.3 199.01,26.18 ; J26.3 200.19,23.5 ; J26.3 199.01,20.81 ; J26.3 197.83,23.5 ; 26.67,224.61 M6.1 ; M6.1 29.39,227.33 ; M6.1 23.95,227.33 ; M6.1 26.67,230.05 ; J19.2 143.51,211.98 ; J19.2 144.45,211.04 ; J19.2 142.57,211.04 ; J19.2 143.51,210.1 ; J1.2 73.36,59.47 ; J1.2 72.42,58.53 ; J1.2 72.42,60.41 ; J1.2 71.48,59.47 ; 209.77,154.24 J3.2 ; J3.2 209.77,156.13 ; J3.2 208.83,155.19 ; J3.2 210.71,155.19 ; J13.2 113.03,36.28 ; J13.2 113.03,34.4 ; J13.2 113.97,35.34 ; J13.2 112.09,35.34 ; J9.2 213.58,111.43 ; J9.2 214.52,110.49 ; J9.2 212.64,110.49 ; J9.2 213.58,109.55 ; 160.27,38.89 J24.2 ; J24.2 160.27,40.77 ; J24.2 161.21,39.83 ; J24.2 159.32,39.83 ; 194.31,19.31 J26.2 ; J26.2 191.63,20.5 ; J26.2 194.31,21.68 ; J26.2 196.99,20.5 ; J23.2 198.93,68.28 ; J23.2 197.99,67.34 ; J23.2 198.93,66.4 ; J23.2 199.87,67.34 ; 41.43,93.73 J15.2 ; J15.2 43.31,93.73 ; J15.2 42.37,92.79 ; J15.2 42.37,94.68 ; J4.2 113.03,41.36 ; J4.2 113.03,39.48 ; J4.2 113.97,40.42 ; J4.2 112.09,40.42 ; J2.2 194.53,70.82 ; J2.2 194.53,68.94 ; J2.2 193.59,69.88 ; J2.2 195.47,69.88 ; J7.2 185.06,191.99 ; J7.2 184.12,192.93 ; J7.2 184.12,191.05 ; J7.2 183.18,191.99 ; 26.67,21.41 M4.1 ; M4.1 26.67,26.85 ; M4.1 23.95,24.13 ; M4.1 29.39,24.13 ; 95.33,211.63 J18.2 ; J18.2 96.27,210.69 ; J18.2 97.22,211.63 ; J18.2 96.27,212.57 ; J20.2 186.66,197.33 ; J20.2 186.66,195.45 ; J20.2 187.6,196.39 ; J20.2 185.72,196.39 ; J5.2 43.9,140.97 ; J5.2 42.02,140.97 ; J5.2 42.96,140.03 ; J5.2 42.96,141.91 ; 218.66,109.55 J22.2 ; J22.2 219.6,110.49 ; J22.2 217.72,110.49 ; J22.2 218.66,111.43 ; J11.2 143.51,217.06 ; J11.2 143.51,215.18 ; J11.2 144.45,216.12 ; J11.2 142.57,216.12 ; 229.87,224.61 M5.1 ; M5.1 232.59,227.33 ; M5.1 227.15,227.33 ; M5.1 229.87,230.05 ; 157.73,43.29 J8.2 ; J8.2 157.73,45.17 ; J8.2 158.67,44.23 ; J8.2 156.78,44.23 ; 128.27,53.16 128.27,125.73 ; 128.27,125.73 200.84,125.73 ; 128.27,125.73 55.7,125.73 ; 128.27,125.73 128.27,198.3 ; J17.2 62.01,182.52 ; J17.2 61.07,181.58 ; J17.2 62.95,181.58 ; J17.2 62.01,180.64
  BOTTOM w0.127: J3.2 210.71,155.19 ; J3.2 209.77,156.13 ; J3.2 208.83,155.19 ; J3.2 209.77,154.24 ; M6.1 26.67,230.05 ; M6.1 29.39,227.33 ; M6.1 26.67,224.61 ; M6.1 23.95,227.33 ; 46.77,95.33 J10.2 ; J10.2 47.71,96.27 ; J10.2 45.83,96.27 ; J10.2 46.77,97.22 ; J19.2 144.45,211.04 ; J19.2 143.51,211.98 ; J19.2 143.51,210.1 ; J19.2 142.57,211.04 ; 61.07,181.58 J17.2 ; J17.2 62.01,182.52 ; J17.2 62.01,180.64 ; J17.2 62.95,181.58 ; 42.37,92.79 J15.2 ; J15.2 41.43,93.73 ; J15.2 42.37,94.68 ; J15.2 43.31,93.73 ; 42.96,140.03 J5.2 ; J5.2 42.02,140.97 ; J5.2 42.96,141.91 ; J5.2 43.9,140.97 ; 71.48,59.47 J1.2 ; J1.2 72.42,60.41 ; J1.2 73.36,59.47 ; J1.2 72.42,58.53 ; J6.2 98.81,208.17 ; J6.2 98.81,206.29 ; J6.2 97.87,207.23 ; J6.2 99.76,207.23 ; 26.67,21.41 M4.1 ; M4.1 26.67,26.85 ; M4.1 23.95,24.13 ; M4.1 29.39,24.13 ; J18.2 97.22,211.63 ; J18.2 96.27,212.57 ; J18.2 96.27,210.69 ; J18.2 95.33,211.63 ; J11.2 144.45,216.12 ; J11.2 142.57,216.12 ; J11.2 143.51,217.06 ; J11.2 143.51,215.18 ; 198.93,66.4 J23.2 ; J23.2 198.93,68.28 ; J23.2 197.99,67.34 ; J23.2 199.87,67.34 ; 185.72,196.39 J20.2 ; J20.2 186.66,195.45 ; J20.2 186.66,197.33 ; J20.2 187.6,196.39 ; J22.2 218.66,111.43 ; J22.2 218.66,109.55 ; J22.2 219.6,110.49 ; J22.2 217.72,110.49 ; 227.15,227.33 M5.1 ; M5.1 232.59,227.33 ; M5.1 229.87,224.61 ; M5.1 229.87,230.05 ; 112.09,35.34 J13.2 ; J13.2 113.97,35.34 ; J13.2 113.03,36.28 ; J13.2 113.03,34.4 ; J21.2 214.17,158.67 ; J21.2 214.17,156.78 ; J21.2 213.23,157.73 ; J21.2 215.11,157.73 ; 37.88,140.03 J16.2 ; J16.2 38.82,140.97 ; J16.2 36.94,140.97 ; J16.2 37.88,141.91 ; J14.2 69.88,56.01 ; J14.2 68.94,55.07 ; J14.2 70.82,55.07 ; J14.2 69.88,54.13 ; 160.27,38.89 J24.2 ; J24.2 159.32,39.83 ; J24.2 161.21,39.83 ; J24.2 160.27,40.77 ; 56.67,184.12 J12.2 ; J12.2 57.61,185.06 ; J12.2 57.61,183.18 ; J12.2 58.55,184.12 ; 193.59,69.88 J2.2 ; J2.2 194.53,70.82 ; J2.2 195.47,69.88 ; J2.2 194.53,68.94 ; J4.2 113.03,41.36 ; J4.2 112.09,40.42 ; J4.2 113.97,40.42 ; J4.2 113.03,39.48 ; 128.27,53.16 128.27,125.73 ; 128.27,125.73 55.7,125.73 ; 128.27,125.73 200.84,125.73 ; 128.27,125.73 128.27,198.3 ; J26.2 196.99,20.5 ; J26.2 194.31,19.31 ; J26.2 194.31,21.68 ; J26.2 191.63,20.5 ; 156.78,44.23 J8.2 ; J8.2 157.73,45.17 ; J8.2 158.67,44.23 ; J8.2 157.73,43.29 ; 199.01,20.81 J26.3 ; J26.3 200.19,23.5 ; J26.3 197.83,23.5 ; J26.3 199.01,26.18 ; J9.2 213.58,111.43 ; J9.2 213.58,109.55 ; J9.2 214.52,110.49 ; J9.2 212.64,110.49 ; J7.2 185.06,191.99 ; J7.2 184.12,191.05 ; J7.2 184.12,192.93 ; J7.2 183.18,191.99 ; M3.1 232.59,24.13 ; M3.1 229.87,26.85 ; M3.1 227.15,24.13 ; M3.1 229.87,21.41
  vias: v1(200.66,24.13) v1(200.66,23.5) v1(200.66,22.86) v1(201.3,22.86) v1(201.93,24.13) v1(201.93,23.5) v1(201.93,22.86) v1(202.56,24.13) v1(202.56,23.5) v1(202.56,22.86) v1(203.2,24.13) v1(203.2,23.5) v1(203.2,22.86) v1(203.84,24.13) v1(203.84,23.5) v1(203.84,22.86)
GND_SIGNAL: length 39.2
  TOP w0.127: L2.1 231.51,42.25 ; L2.1 229.74,43.26 ; L2.1 229.74,41.25 ; L2.1 227.98,42.25
  TOP w0.203: J25.14 v1(50.17,27.76) ; J25.27 v1(50.17,18.42) ; J25.29 v1(52.71,18.42) ; J25.39 J25.40 67.77,20.78 v1(67.95,20.95)
  TOP w0.381: J25.14 J25.27
  GND2 w0.381: v1(52.71,18.42) 55.25,20.95 v1(67.95,20.95)
  BOTTOM w0.381: v1(52.71,18.42) 52.07,19.05 50.8,19.05 v1(50.17,18.42)
  vias: v1(227.91,45.72) v1(227.91,45.09) v1(227.91,44.45) v1(228.55,45.72) v1(228.55,45.09) v1(228.55,44.45) v1(229.18,45.72) v1(229.18,45.09) v1(229.18,44.45) v1(229.82,45.72) v1(229.82,45.09) v1(229.82,44.45) v1(230.45,45.72) v1(230.45,45.09) v1(230.45,44.45) v1(231.09,45.72) v1(231.09,45.09) v1(231.09,44.45)
CS0: length 614.5
  TOP w0.203: J3.7 205.28,166.18 J21.7 ; J9.7 J22.7 ; v1(198.71,82.13) 211.07,103.54 211.07,103.54 v1(211.07,123.19) 211.07,123.72 211.06,123.74 211.06,147.95 v1(201.25,164.93) 191.05,182.6 185.1,188.55 185.07,188.55 v1(171.87,196.17) 150.44,208.53 v1(130.81,208.53) 106.08,208.53 v1(89.07,198.71) 71.4,188.51 71.4,188.48 65.45,182.53 v1(57.83,169.33) 45.47,147.92 45.47,147.92 v1(45.47,128.27) 45.47,103.54 v1(55.29,86.53) 65.49,68.86 71.44,62.91 71.47,62.91 v1(84.67,55.29) 104.52,43.83 ; 104.52,43.83 106.08,42.93 v1(125.73,42.93) 150.46,42.93 150.46,42.93 v1(167.47,52.75) ; 104.52,43.83 104.47,43.78 104.47,41.78 98.4,35.71 98.4,17.42 97.8,16.82 RN5.4 ; J6.7 85.28,203.42 J18.7 ; J16.7 J5.7 ; J2.7 203.42,78.34 J23.7 ; J17.7 53.12,173.12 J12.7 ; J10.7 50.58,82.74 J15.7 ; J20.7 173.12,200.2 J7.7 ; J19.7 J11.7
  TOP w0.381: J8.7 168.72,48.72 J24.7 ; J1.7 83.42,51.26 J14.7 ; J4.7 J13.7
  LAYER 1 w0.203: J5.7 v1(45.47,128.27) ; J9.7 v1(211.07,123.19) ; J7.7 v1(171.87,196.17) ; J19.7 v1(130.81,208.53) ; J2.7 v1(198.71,82.13) ; J3.7 v1(201.25,164.93) ; J17.7 v1(57.83,169.33) ; J6.7 v1(89.07,198.71) ; J4.7 v1(125.73,42.93) ; J10.7 v1(55.29,86.53) ; J8.7 v1(167.47,52.75) ; J1.7 v1(84.67,55.29)
CS1: length 646.6
  TOP w0.203: J3.8 204.01,168.38 J21.8 ; J7.8 170.92,201.47 J20.8 ; v1(169.04,55.12) 150.23,44.26 150.16,44.2 v1(128.27,44.2) 106.42,44.2 v1(87.5,55.12) 72.11,64.01 72.02,64.01 66.66,69.37 v1(57.66,84.96) 46.74,103.88 46.74,103.88 v1(46.74,125.73) 46.74,147.58 v1(57.66,166.5) 66.55,181.89 66.55,181.98 71.91,187.34 v1(87.5,196.34) 106.31,207.2 106.38,207.26 v1(128.27,207.26) 150.12,207.26 150.12,207.26 v1(169.04,196.34) 169.04,196.34 184.45,187.44 184.51,187.4 184.56,187.4 189.88,182.09 v1(198.88,166.5) 209.82,147.54 209.82,126.28 209.8,126.26 v1(209.8,125.73) 209.8,103.73 209.6,103.53 v1(198.88,84.96) ; J9.8 J22.8 ; J17.8 51.85,170.92 J12.8 ; J23.8 204.69,80.54 J2.8 ; v1(105.54,41.93) 99.05,35.44 99.05,17.15 98.07,16.17 RN5.3 ; J10.8 51.85,80.54 J15.8 ; J16.8 J5.8 ; J11.8 J19.8 ; J18.8 83.08,202.15 J6.8
  TOP w0.381: J8.8 170.92,49.99 J24.8 ; J4.8 J13.8 ; J14.8 85.62,49.99 J1.8
  LAYER 1 w0.203: J6.8 v1(87.5,196.34) ; J7.8 v1(169.04,196.34) ; J2.8 v1(198.88,84.96) ; J1.8 v1(87.5,55.12) ; J9.8 v1(209.8,125.73) ; J10.8 v1(57.66,84.96) ; J3.8 v1(198.88,166.5) ; J4.8 v1(128.27,44.2) ; J5.8 v1(46.74,125.73) ; J8.8 v1(169.04,55.12) ; J17.8 v1(57.66,166.5) ; J19.8 v1(128.27,207.26)
  BOTTOM w0.203: J14.8 85.37,48.11 103.58,40.31 v1(105.54,41.93)
CS2: length 651.6
  TOP w0.203: J17.9 50.58,168.72 J12.9 ; J18.9 80.88,200.88 J6.9 ; J19.9 J11.9 ; v1(105.39,40.86) 99.7,35.17 99.7,16.88 98.34,15.52 RN5.2 ; J15.9 53.12,78.34 J10.9 ; J7.9 168.72,202.74 J20.9 ; v1(170.6,57.49) 149.78,45.47 v1(130.81,45.47) 106.76,45.47 v1(90.34,54.95) 72.74,65.11 72.69,65.11 67.71,70.09 v1(60.03,83.4) 48,104.24 47.99,104.25 47.99,122.64 48.01,122.66 v1(48.01,123.19) 48.01,147.24 v1(57.49,163.66) 67.65,181.26 67.65,181.31 72.63,186.29 v1(85.94,193.97) 106.76,205.99 v1(125.73,205.99) 126.26,205.99 126.29,205.97 149.82,205.97 v1(166.2,196.51) 183.8,186.35 183.85,186.32 183.87,186.32 188.83,181.37 v1(196.51,168.06) 208.55,147.21 208.56,147.2 208.56,128.83 208.53,128.8 v1(208.53,128.27) 208.53,104.01 208.25,103.73 v1(199.05,87.8) ; J21.9 202.74,170.58 J3.9 ; J23.9 205.96,82.74 J2.9 ; J9.9 J22.9 ; J16.9 J5.9
  TOP w0.381: J8.9 173.12,51.26 J24.9 ; J1.9 87.82,48.72 J14.9 ; J4.9 J13.9
  LAYER 1 w0.203: J3.9 v1(196.51,168.06) ; J2.9 v1(199.05,87.8) ; J7.9 v1(166.2,196.51) ; J1.9 v1(90.34,54.95) ; J5.9 v1(48.01,123.19) ; J9.9 v1(208.53,128.27) ; J19.9 v1(125.73,205.99) ; J6.9 v1(85.94,193.97) ; J4.9 v1(130.81,45.47) ; J8.9 v1(170.6,57.49) ; J17.9 v1(57.49,163.66) ; J10.9 v1(60.03,83.4)
  BOTTOM w0.203: J14.9 87.91,46.56 103.56,39.5 105.16,40.16 v1(105.39,40.86)
CS3: length 660.7
  TOP w0.203: J3.10 201.47,172.78 J21.10 ; J18.10 78.68,199.61 J6.10 ; J2.10 207.23,84.94 J23.10 ; J10.10 54.39,76.14 J15.10 ; J20.10 166.52,204.01 J7.10 ; J16.10 J5.10 ; v1(106.51,41.06) 100.35,34.9 100.35,16.61 98.61,14.87 RN5.1 ; v1(199.22,90.63) 207.24,104.52 207.26,104.55 v1(207.26,130.81) 207.26,131.34 207.33,131.41 207.33,146.79 207.32,146.79 v1(194.14,169.63) 187.78,180.65 187.78,180.66 183.21,185.22 v1(163.37,196.68) 149.43,204.72 v1(123.19,204.72) 107.1,204.72 107.1,204.72 v1(84.37,191.6) 73.35,185.24 73.34,185.24 68.78,180.67 v1(57.32,160.83) 49.28,146.9 49.28,146.9 v1(49.28,120.65) 49.28,104.57 v1(62.4,81.83) 68.76,70.81 73.33,66.25 73.33,66.24 v1(93.17,54.78) 107.1,46.74 v1(133.35,46.74) 149.46,46.74 149.49,46.77 v1(172.17,59.86) ; J19.10 J11.10 ; J17.10 49.31,166.52 J12.10 ; J9.10 J22.10
  TOP w0.381: J8.10 175.32,52.53 J24.10 ; J14.10 90.02,47.45 J1.10 ; J4.10 J13.10
  LAYER 1 w0.203: J1.10 v1(93.17,54.78) ; J6.10 v1(84.37,191.6) ; J5.10 v1(49.28,120.65) ; J8.10 v1(172.17,59.86) ; J3.10 v1(194.14,169.63) ; J4.10 v1(133.35,46.74) ; J10.10 v1(62.4,81.83) ; J17.10 v1(57.32,160.83) ; J7.10 v1(163.37,196.68) ; J9.10 v1(207.26,130.81) ; J19.10 v1(123.19,204.72) ; J2.10 v1(199.22,90.63)
  BOTTOM w0.203: J14.10 89.71,45.21 103.45,38.48 105.82,38.99 v1(106.51,41.06)
